# Allegro board RD_T31_SNIPE_M_V1.0_20190715A.brd
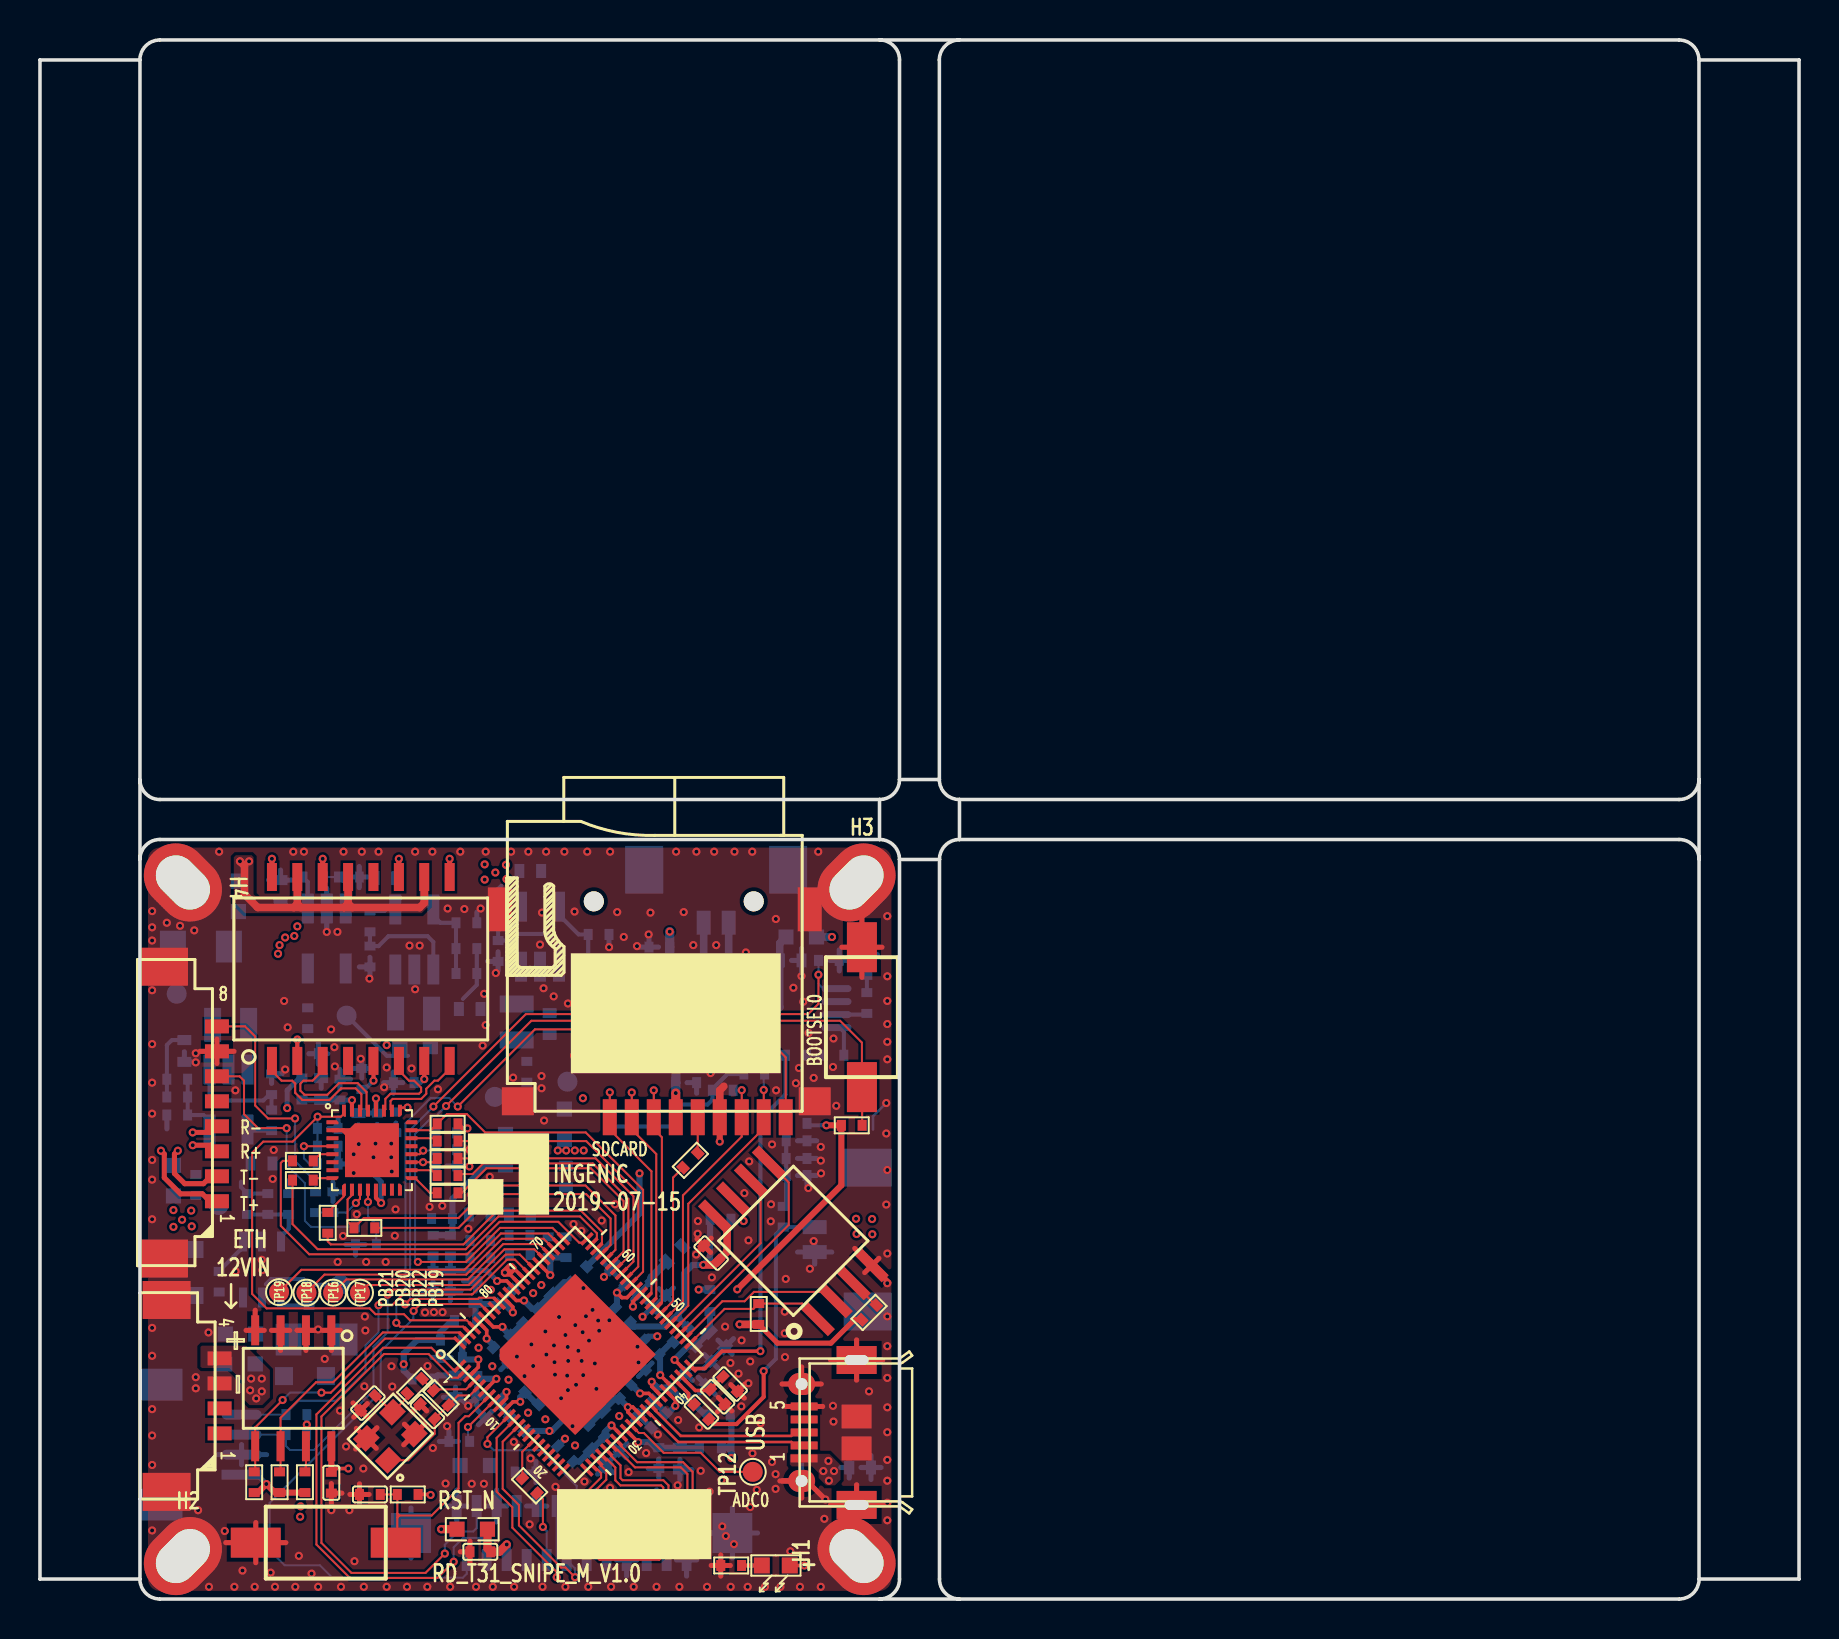
[diagram p0: board, top side]
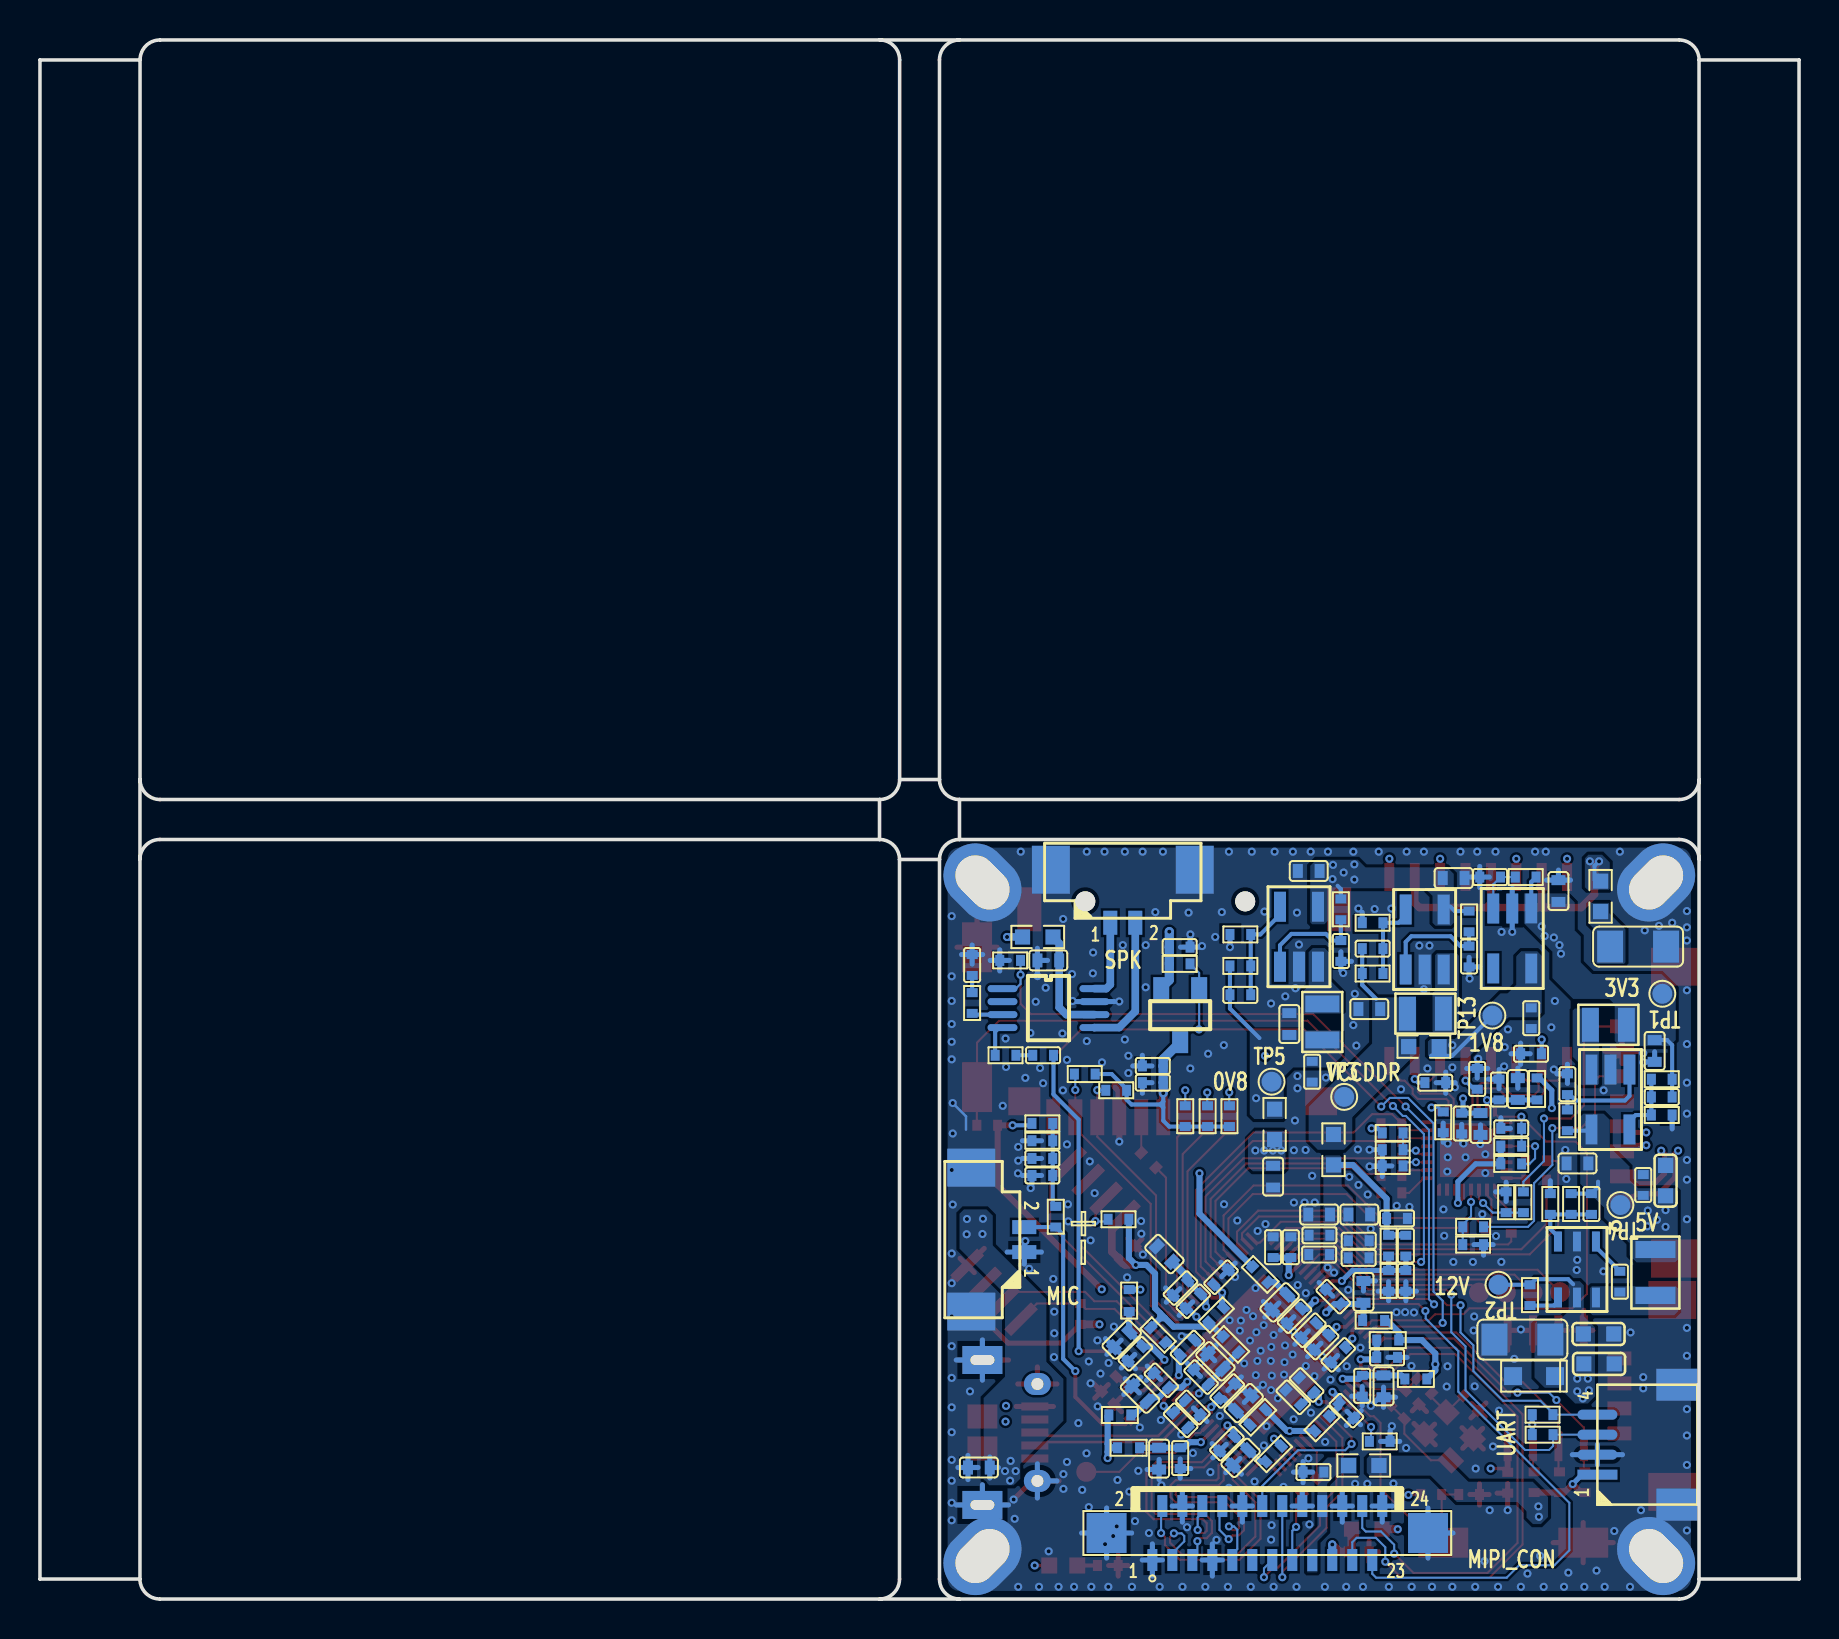
[diagram p1: board, bottom side, seen from below]

Outline 88 x 78 mm; copper layers: TOP, L2_GND, L3_PWR, BOTTOM. Coordinates in mm from the lower left corner of the outline.
Outline path: 5,1 0,1 0,77 5,77 ; 5,1 5,37 ; 5,1 arc(5.29,0.29) 6,0 42,0 ; 5,77 5,41 ; 5,77 arc(5.29,77.71) 6,78 42,78 ; 5,41 5,37 ; 5,41 arc(5.29,40.29) 6,40 42,40 ; 5,37 arc(5.29,37.71) 6,38 42,38 ; 42,40 42,38 ; 42,40 arc(42.71,40.29) 43,41 ; 42,38 arc(42.71,37.71) 43,37 ; 42,78 arc(42.71,77.71) 43,77 43,41 ; 42,78 45.99,78 ; 45.99,78 arc(45.29,77.71) 44.99,77 44.99,41 ; 45.99,78 81.99,78 arc(82.7,77.71) 82.99,77 ; 43,37 43,1 arc(42.71,0.29) 42,0 ; 43,37 45,37 ; 42,0 46,0 ; 46,0 arc(45.29,0.29) 45,1 45,37 ; 46,0 82,0 arc(82.71,0.29) 83,1 ; 43,41 44.99,41 ; 44.99,41 arc(45.29,40.29) 45.99,40 ; 45,37 arc(45.29,37.71) 46,38 ; 46,38 46,39.99 45.99,40 ; 46,38 82,38 arc(82.71,37.71) 83,37 ; 45.99,40 81.99,40 arc(82.7,40.29) 82.99,41 ; 82.99,77 82.99,41 ; 82.99,77 88,77 88,1 83,1 ; 83,37 83,40.99 82.99,41 ; 83,37 83,1

## Design rules (mm)
net group DP1: nets N15378792 N15378804
net group DP2: nets N15378878 N15378898
net group DP3: nets MIPI_DATAN1 MIPI_DATAP1
net group DP4: nets MIPI_DATAN0 MIPI_DATAP0
net group MIPI_CLK: nets MIPI_CLKN MIPI_CLKP
net group RX: nets RX+ RX-
net group TX: nets TX+ TX-
net group USB90: nets USB_DM0 USB_DP0
net group DEFAULT: nets BOOTSEL0 EXCLKI EXCLKO FX GMAC_CLKOUT GMAC_CRS_DV GMAC_MDC GMAC_MDIO GMAC_RST_N GMAC_RXD0 GMAC_RXD1 GMAC_TXD0 GMAC_TXD1 GMAC_TXEN IR IRCUTN IRCUTP LED LINK/ACT MII MSC0_CLK MSC0_CMD MSC0_D0 MSC0_D1 MSC0_D2 MSC0_D3 N3362923 N3362941 N15313394 N15316757 N15319926 N15320102 N15322230 N15322330 N15358486 N15358490 N15358494 N15359340 N15359934 N15360440 N15378796 N15379006 N15379034 N15379500 PPRST_N SD0_CD_N SENSOR_RESET SFC_CS_N SFC_SCLK SPEAK_EN SPEED
net group POW: nets AVDD_PHY CODEC_AVDD DDR_VREF DDRPLL_AVD18 HPOUT MICP N04375 N15313450 N15313454 N15316521 N15378850 N15378902 N15378968 N15382667 N15382675 N15382741 N15382761 N15382881 N15384349 USB_AVD18 USB_AVD33 VDDIO_D VDDMSC0
nets with their own width: min track width 0.127; nets GND

## Placement (name value [footprint] x y rotation side)
C1  22uF-1206  [C1206]  13.84 12.98 0 bottom
C2  10uF  [C0402_E]  11.08 21.79 0 bottom
C3  100nF  [C0402]  11.59 25.76 90 bottom
C4  22pF  [C0402]  6.87 25.12 0 bottom
C5  10uF  [C0402_E]  7.22 27.42 270 bottom
C6  22pF  [C0402]  21.33 32.54 180 bottom
C7  10uF  [C0402_E]  17.28 36.07 180 bottom
C8  100nF  [C0402]  16.51 32.15 270 bottom
C9  10uF  [C0402_E]  21.5 29.52 0 bottom
C10  10nF  [C0402]  8.96 15.88 270 bottom
C11  10uF-0603  [C0603]  10 11.76 180 bottom
C12  10uF-0603  [C0603]  10.03 13.26 180 bottom
C13  22pF  [C0402]  10.38 19.76 270 bottom
C14  10uF-0603  [C0603]  6.68 20.93 90 bottom
C15  100nF  [C0402]  7.79 20.72 90 bottom
C16  22pF  [C0402]  27.95 30.23 0 bottom
C17  10uF  [C0402_E]  24.53 36.43 0 bottom
C18  100nF  [C0402]  22.92 32.42 270 bottom
C19  10uF  [C0402_E]  25.5 28.77 90 bottom
C20  100nF  [C0402]  24.35 26.38 270 bottom
C21  100nF  [C0402]  19.67 17.68 90 bottom
C22  4.7uF  [C0402]  20.11 19.04 180 bottom
C23  100nF  [C0402]  19.67 15.92 90 bottom
C24  10uF  [C0402_E]  24.01 19.24 0 bottom
C25  100nF  [C0402]  22.03 17.93 180 bottom
C26  10nF  [C0402]  24.52 13.45 315 bottom
C27  10nF  [C0402]  30.95 15.56 315 bottom
C28  10nF  [C0402]  24.01 17.23 0 bottom
C29  10uF  [C0402_E]  22 19.24 180 bottom
C30  100nF  [C0402]  23.99 18.2 0 bottom
C31  10nF  [C0402]  30.93 8.94 225 bottom
C33  10nF  [C0402]  22.03 17.07 180 bottom
C34  10uF  [C0402_E]  26.31 21.13 270 bottom
C35  10uF  [C0402_E]  31.75 17.26 45 bottom
C36  100nF  [C0402]  30.32 9.59 225 bottom
C37  100nF  [C0402]  25.42 17.6 90 bottom
C38  100nF  [C0402]  23.88 12.83 315 bottom
C39  100nF  [C0402]  30.3 14.9 315 bottom
C40  100nF  [C0402]  24.63 10.71 45 bottom
C42  10nF  [C0402]  25.3 10.09 45 bottom
C43  10nF  [C0402]  26.31 17.6 90 bottom
C45  100nF  [C0402]  28.91 16.1 135 bottom
C48  100nF  [C0402]  22.64 9.42 225 bottom
C49  10uF  [C0402_E]  27.94 7.06 315 bottom
C50  100nF  [C0402]  28.62 7.77 315 bottom
C51  10uF  [C0402_E]  32.01 7.02 270 bottom
C52  100nF  [C0402]  30.96 7.05 270 bottom
C53  10uF  [C0402_E]  33.88 12.98 315 bottom
C54  100nF  [C0402]  33.2 12.27 315 bottom
C55  10uF  [C0402_E]  27.78 9.8 135 bottom
C56  100nF  [C0402]  28.61 10.41 135 bottom
C57  10uF  [C0402_E]  29.2 11.9 45 bottom
C58  100nF  [C0402]  29.91 11.11 45 bottom
C59  100nF  [C0402]  23.3 15.13 45 bottom
C60  100nF  [C0402]  25.24 14.15 315 bottom
C61  100nF  [C0402]  31.9 10.95 45 bottom
C64  100nF  [C0402]  34.53 10.76 135 top
C65  100nF  [C0402]  21.85 10.67 270 bottom
C67  12pF  [C0402]  19.38 9.38 315 top
C68  4.7uF  [C0402]  33.9 10.12 135 top
C69  12pF  [C0402]  16.4 9.8 45 top
C70  100nF  [C0402]  33.57 17.31 315 top
C72  100nF  [C0402]  14.58 5.82 90 top
C74  4.7uF  [C0402]  22.03 2.36 0 top
C77  4.7uF  [C0402]  30.98 32.62 180 bottom
C80  4.7uF  [C0402]  24.29 6.35 180 bottom
C81  100nF  [C0402]  32.33 25.83 0 bottom
C84  10uF  [C0402_E]  14.07 25.52 90 bottom
C85  100nF  [C0402]  15.01 25.49 90 bottom
C86  10uF  [C0402_E]  15.93 23.77 270 bottom
C87  100nF  [C0402]  16.87 23.79 270 bottom
C88  100nF  [C0402]  18.2 25.83 0 bottom
C89  100nF  [C0402]  16.1 26.02 270 bottom
C90  100nF  [C0402]  13.41 27.28 180 bottom
C91  1nF/2KV-1206  [C1206]  8.05 32.64 0 bottom
C92  100nF  [C0402]  14.4 23.55 0 bottom
C93  3.3nF  [C0402]  41.37 31.72 90 bottom
C94  3.3nF  [C0402]  37.82 27.2 180 bottom
C95  10uF  [C0402_E]  37.56 31.95 0 bottom
C97  100nF  [C0402]  33.09 9.36 315 top
C98  4.7uF  [C0402]  37.85 22.04 0 bottom
C99  100nF  [C0402]  37.85 21.19 0 bottom
C100  4.7uF  [C0402]  16.51 5.23 180 top
C101  4.7uF  [C0402]  32.33 26.67 0 bottom
C102  10uF  [C0402_E]  41.03 6.58 0 bottom
C103  10uF  [C0402_E]  21.79 15.37 90 bottom
C104  10uF  [C0402_E]  25.98 14.84 315 bottom
C105  10uF  [C0402_E]  32.97 10.28 45 bottom
C107  10uF  [C0402_E]  20.79 10.64 270 bottom
C111  10uF  [C0402_E]  12.04 35.42 90 bottom
C112  4.7uF  [C0402]  13.39 29.06 270 bottom
C113  100nF  [C0402]  15.45 36.12 0 bottom
C116  100nF  [C0402]  23.05 12.21 315 bottom
C118  100nF  [C0402]  30.59 12.58 135 bottom
C120  100nF  [C0402]  20.61 12.09 180 bottom
D1  BZT52C12S  [SOD323]  13.25 11.15 180 bottom
D2  LED Red  [D0603_LED]  36.81 1.68 180 top
FB11  1000ohm/250mA  [FB0402]  13.1 25.52 90 bottom
FB14  1000ohm/250mA  [FB0402]  26.29 7.26 135 bottom
FB15  1000ohm/250mA  [FB0402]  33.54 7.57 0 bottom
FB16  1000ohm/250mA  [FB0402]  27.07 9.09 135 bottom
FB17  1000ohm/250mA  [FB0402]  20.57 12.95 180 bottom
FB18  1000ohm/250mA  [FB0402]  19.17 11.01 180 bottom
FB19  1000ohm/250mA  [FB0402]  33.51 14.93 270 bottom
FB20  1000ohm/250mA  [FB0402]  33.98 9.21 180 bottom
FB21  1000ohm/250mA  [FB0402]  28.43 12.74 225 bottom
FB22  1000ohm/250mA  [FB0402]  26.95 16.24 45 bottom
FB23  1000ohm/250mA  [FB0402]  21.28 13.93 180 bottom
H1  MHOBL  [MHOLE_3D0X2D0]  40.85 2.15 90 top
H2  MHOBL  [MHOLE_3D0X2D0]  7.15 2.15 0 top
H3  MHOBL  [MHOLE_3D0X2D0]  40.85 35.85 0 top
H4  MHOBL  [MHOLE_3D0X2D0]  7.15 35.85 270 top
J1  CON4 1.25mm LT  [CON4-1D25-LT]  6.89 10.16 270 top
J3  MICROSD_TF  [TFCARD]  30.76 24.3 180 top
J4  CON8 1.25mm LT  [CON8-1D25-LT]  6.75 24.33 270 top
J5  CON2 1.25mm LT  [CON2-1D25-LT]  33.83 35.94 0 bottom
J7  CON2 1.25mm LT  [CON2-1D25-LT]  40.86 17.98 270 bottom
J9  MICRO USB  [MICROUSB_B_NJ5P]  38.23 8.33 270 top
J18  CON24 0.5mm LT  [FPC-CON24-0D5-LT]  26.6 3.3 180 bottom
J38  CON4 1.0mm WT  [CON4-1D0-WT]  7.59 7.72 90 bottom
L1  2.2uH/1.3A-2016  [L2016]  9.54 28.73 0 bottom
L2  2.2uH/1.3A-2016  [L2016]  18.69 29.29 180 bottom
L3  4.7uH/1.4A-2520  [L2520]  7.18 16.33 90 bottom
L4  2.2uH/1.3A-2016  [L2016]  23.85 28.87 90 bottom
NOREF  -  []  44.66 -10.88 0 top
NOREF#2  -  []  -41.62 136.12 0 top
NOREF#3  -  []  41.27 158.18 0 top
NOREF#4  -  []  31.26 6.54 0 top
NOREF#5  -  []  -189.11 -122.58 0 top
NOREF#6  -  []  5 1 0 top
NOREF#7  -  []  5.32 37.73 0 top
NOREF#8  -  []  6 0 90 top
Q1  WPM3401  [SOT23]  30.96 29.21 0 bottom
R1  100K  [R0402]  11.59 23.95 90 bottom
R2  150K/1%  [R0402]  6.87 26.01 180 bottom
R3  33.2K/1%  [R0402]  6.87 24.22 0 bottom
R4  100K  [R0402]  16.51 33.9 270 bottom
R5  200K/1%  [R0402]  21.33 31.29 180 bottom
R6  100K/1%  [R0402]  21.33 33.83 180 bottom
R7  100K  [R0402]  13.46 15.2 270 bottom
R8  200K/1%  [R0402]  11.4 19.76 270 bottom
R9  27K/1%  [R0402]  12.44 19.76 270 bottom
R10  100K  [R0402]  22.92 34.5 270 bottom
R11  40.2K/1%  [R0402]  27.95 31.68 0 bottom
R12  120K/1%  [R0402]  27.95 33.25 180 bottom
R13  1K  [R0402]  34.58 1.68 180 top
R17  100K/1%  [R0402]  20.53 17.68 90 bottom
R19  100K/1%  [R0402]  20.53 15.92 90 bottom
R20  1M  [R0402]  20.06 10.07 315 top
R21  33R  [R0402]  18.75 10.66 45 top
R22  33R  [R0402]  16.23 18.57 180 top
R23  33R  [R0402]  14.4 18.82 90 top
R24  33R  [R0402]  13.15 20.96 0 top
R25  33R  [R0402]  13.15 21.92 0 top
R26  33R  [R0402]  20.39 22.91 180 top
R27  33R  [R0402]  24.49 5.66 135 top
R29  33R  [R0402]  32.54 21.95 45 top
R30  10K  [R0402]  13.25 5.84 90 top
R31  10K  [R0402]  10.71 5.84 270 top
R32  10K  [R0402]  11.98 5.84 270 top
R33  0R  [R0402]  29.16 14.21 135 bottom
R34  0R-0603  [R0603]  23.29 22.48 90 bottom
R35  33R  [R0402]  20.98 7.89 0 bottom
R37  100K  [R0402]  34.16 25.45 0 bottom
R38  100K  [R0402]  30.7 24.16 90 bottom
R39  100K  [R0402]  35.73 26.27 0 bottom
R40  100K  [R0402]  28.49 24.16 90 bottom
R41  100K  [R0402]  29.59 24.16 90 bottom
R42  100K  [R0402]  30.98 31.78 180 bottom
R44  10K  [R0402]  14.4 21.77 0 bottom
R45  10K  [R0402]  20.33 23.32 0 bottom
R46  10K  [R0402]  20.33 22.48 0 bottom
R47  10K  [R0402]  20.33 21.67 0 bottom
R48  10K  [R0402]  14.65 19.85 90 bottom
R49  10K  [R0402]  20.39 23.77 0 top
R50  33R  [R0402]  20.39 21.18 180 top
R51  10K  [R0402]  16.3 17.73 180 bottom
R52  33R  [R0402]  20.39 20.32 180 top
R53  33R  [R0402]  20.39 22.05 180 top
R54  75R/1%-0603  [R0603]  9.93 35.16 90 bottom
R55  10K  [R0402]  14.4 22.66 0 bottom
R56  300R  [R0402]  16.3 18.62 0 bottom
R57  300R  [R0402]  13.79 19.85 270 bottom
R58  6.19K/1%  [R0402]  17.8 23.85 270 bottom
R59  10K  [R0402]  39.47 31.95 0 bottom
R60  0R  [R0402]  23.86 8.78 135 bottom
R61  68K/1%  [R0402]  41.37 29.82 90 bottom
R62  68K/1%  [R0402]  39.7 27.2 180 bottom
R63  0R-0603  [R0603]  26.23 23.75 270 bottom
R64  0R  [R0402]  32.06 13.21 45 bottom
R65  2.2K  [R0402]  37.18 19.13 270 bottom
R66  10K  [R0402]  41.47 14.34 45 top
R67  10K  [R0402]  35.96 14.26 90 top
R68  10K  [R0402]  34.05 19 180 bottom
R69  82K/1%  [R0402]  37.85 23.8 0 bottom
R70  100K/1%  [R0402]  37.85 22.93 180 bottom
R71  100K  [R0402]  40.61 23.7 180 top
R72  10K  [R0402]  12.82 8.22 180 bottom
R73  10K  [R0402]  12.83 9.22 180 bottom
R74  0R-0603  [R0603]  38.08 33.12 0 bottom
R77  100K  [R0402]  18.4 5.23 180 top
R85  100K  [R0402]  13.67 36.12 0 bottom
R86  0R-0603  [R0603]  18.77 27.64 0 bottom
R87  0R-0603  [R0603]  21.78 6.68 0 bottom
R88  0R-0603  [R0603]  21.62 3.49 0 top
SW1  KEY2_SMD  [SW2_SMD]  41.12 29.11 270 top
SW2  KEY2_SMD  [SW2_SMD]  14.3 2.82 0 top
TP1  TP  [TEST_SMD]  6.84 30.28 0 bottom
TP2  TP  [TEST_SMD]  15.03 15.72 0 bottom
TP3  TP  [TEST_SMD]  22.75 25.12 180 bottom
TP4  TP  [TEST_SMD]  8.94 19.71 0 bottom
TP5  TP  [TEST_SMD]  26.39 25.88 180 bottom
TP12  TP  [TEST_SMD]  35.66 6.36 90 top
TP13  TP  [TEST_SMD]  15.34 29.19 90 bottom
TP16  TP  [TEST_SMD]  14.66 15.33 90 top
TP17  TP  [TEST_SMD]  16.01 15.33 90 top
TP18  TP  [TEST_SMD]  13.33 15.33 90 top
TP19  TP  [TEST_SMD]  11.96 15.35 90 top
U1  LN5058  [SOT23-5]  9.43 24.99 0 bottom
U2  LN5058  [SOT23-5]  18.73 33 180 bottom
U3  ETA8120  [SOT23-6]  11.11 16.49 270 bottom
U4  LN5058  [SOT23-5]  25.02 33.14 180 bottom
U6  GD25Q127CSIG  [WSOP8_1D27]  37.69 17.92 135 top
U7  AT24C02  [SOP8_1D27]  12.67 10.54 270 top
U8  IP101GR  [QFN32_0D4_IP101GR]  16.61 22.46 0 top
U9  FC1680C  [QFP16_1D27]  16.05 31.52 90 top
U10  CS8302M  [MSOP8_0D65]  37.55 29.56 270 bottom
U11  S-1339D18  [SOT23-5]  14.35 33.05 0 bottom
U12  T31 QFN88  [QFN88_0D35_T31]  26.77 12.24 45 top
Y1  24M 2016  [CRY_2D5X2D0]  17.53 8.14 45 top

## Library data of the parts
C1-C31 C33-C40 C42 C43 C45 C48-C61 C64 C65 C67-C70 C72 C74 C77 C80 C81 C84-C95 C97-C105 C107 C111-C113 C116 C118 C120 = CAP
D1 = DIODE_WY
D2 = LED_1
FB11 FB14-FB23 = BEAD
H1-H4 = MHOLE1
J1 = CON_4x1
J3 = MMC_SD
J4 = CON_8x1
J5 J7 = CON_2X1
J9 = MICROUSB_0
J18 = FPCCON_12x2
J38 = CON_4X1
L1-L4 = INDUCTOR
Q1 = P_MOS
R1-R13 R17 R19-R27 R29-R35 R37-R42 R44-R74 R77 R85-R88 = RES
SW1 SW2 = PUSHBUTTON
TP1-TP5 TP12 TP13 TP16-TP19 = TP
U1 U2 U4 = SY8088
U3 = SY8120
U6 = SPI_NOR
U7 = 24C02
U8 = IP101GR
U9 = FC1680C
U10 = CS8302
U11 = SGM2019
U12 = T31_QFN88
Y1 = XTAL_P4

## Footprints (pads in the part's own frame, mm; a bottom-side part is the same pattern mirrored in y, then rotated)
C0402
  rect 0.45x0.55 smd: 1(-0.52,0) 2(0.52,0)
C0402_E
  rect 0.5x0.7 smd: 1(-0.545,0) 2(0.545,0)
C0603
  rect 0.76x0.76 smd: 1(-0.762,0) 2(0.762,0)
C1206
  rect 1.3x1.6 smd: 1(-1.4,0) 2(1.4,0)
CON2-1D25-LT
  rect 0.7x1.2 smd: 1(0.625,2.1) 2(-0.625,2.1)
  rect 1.9x2.4 smd: 3(-3.6,-0.55) 4(3.6,-0.55)
CON4-1D0-WT
  rect 0.5x2 smd: 1(-1.5,2.5)
  oval 0.5x2 smd: 2(-0.5,2.5) 3(0.5,2.5) 4(1.5,2.5)
  rect 1.6x2.1 smd: 5(3,-1.5) 6(-3,-1.5)
CON4-1D25-LT
  rect 0.7x1.2 smd: 1(1.875,2.1) 2(0.625,2.1) 3(-0.625,2.1) 4(-1.875,2.1)
  rect 1.9x2.4 smd: 5(-4.8,-0.55) 6(4.8,-0.55)
CON8-1D25-LT
  rect 0.7x1.2 smd: 1(4.435,2.1) 2(3.185,2.1) 3(1.935,2.1) 4(0.685,2.1) 5(-0.565,2.1) 6(-1.815,2.1) 7(-3.065,2.1) 8(-4.315,2.1)
  rect 1.9x2.4 smd: 9(-7.3,-0.55) 10(7.3,-0.55)
CRY_2D5X2D0
  rect 1x0.9 smd: 1(-0.925,-0.775) 2(0.925,-0.775) 3(0.925,0.775) 4(-0.925,0.775)
D0603_LED
  rect 0.8x0.8 smd: 1(-0.7,0) 2(0.7,0)
FB0402
  rect 0.45x0.55 smd: 1(-0.55,0) 2(0.55,0)
FPC-CON24-0D5-LT
  rect 0.5x1.1 smd: 1(-5.75,-1.35) 2(-5.25,1.35) 3(-4.75,-1.35) 4(-4.25,1.35) 5(-3.75,-1.35) 6(-3.25,1.35) 7(-2.75,-1.35) 8(-2.25,1.35) 9(-1.75,-1.35) 10(-1.25,1.35) 11(-0.75,-1.35) 12(-0.25,1.35) 13(0.25,-1.35) 14(0.75,1.35) 15(1.25,-1.35) 16(1.75,1.35) 17(2.25,-1.35) 18(2.75,1.35) 19(3.25,-1.35) 20(3.75,1.35) 21(4.25,-1.35) 22(4.75,1.35) 23(5.25,-1.35) 24(5.75,1.35)
  rect 2x2 smd: 25(-8.04,0) 26(8.04,0)
L2016
  rect 0.85x1.7 smd: 1(0.9,0) 2(-0.9,0)
L2520
  rect 0.85x2 smd: 1(-1.15,0) 2(1.15,0)
MHOLE_3D0X2D0
  oval 4.2x3.2 hole 3x2 rot 45: 1(0,0)
MICROUSB_B_NJ5P
  rect 0.4x1.35 smd: 1(1.3,0) 2(0.65,0) 3(0,0) 4(-0.65,0) 5(-1.3,0)
  rect 1.4x2 hole 0.5x1.2: 6(3.625,2.625) 7(-3.625,2.625)
  oval 1.1x1.35 hole 0.6: 8(-2.425,-0.125) 9(2.425,-0.125)
  rect 1.2x1.5 smd: 10(-0.8,2.625) 11(0.8,2.625)
MSOP8_0D65
  oval 0.35x1.5 smd: 1(-0.975,-2.3) 2(-0.325,-2.3) 3(0.325,-2.3) 4(0.975,-2.3) 5(0.975,2.3) 6(0.325,2.3) 7(-0.325,2.3) 8(-0.975,2.3)
QFN32_0D4_IP101GR
  custom 0.599x0.198 smd: 1(-1.975,1.4) 8(-1.975,-1.4) 17(1.975,-1.4) 24(1.975,1.4)
  rect 0.6x0.2 smd: 2(-1.975,1) 3(-1.975,0.6) 4(-1.975,0.2) 5(-1.975,-0.2) 6(-1.975,-0.6) 7(-1.975,-1) 18(1.975,-1) 19(1.975,-0.6) 20(1.975,-0.2) 21(1.975,0.2) 22(1.975,0.6) 23(1.975,1)
  custom 0.198x0.599 smd: 9(-1.4,-1.975) 16(1.4,-1.975) 25(1.4,1.975) 32(-1.4,1.975)
  rect 0.2x0.6 smd: 10(-1,-1.975) 11(-0.6,-1.975) 12(-0.2,-1.975) 13(0.2,-1.975) 14(0.6,-1.975) 15(1,-1.975) 26(1,1.975) 27(0.6,1.975) 28(0.2,1.975) 29(-0.2,1.975) 30(-0.6,1.975) 31(-1,1.975)
  custom 2.697x2.697 smd: 33(0,0)
QFN88_0D35_T31
  rect 0.8x0.18 smd: 1(-4.5,3.675) 2(-4.5,3.325) 3(-4.5,2.975) 4(-4.5,2.625) 5(-4.5,2.275) 6(-4.5,1.925) 7(-4.5,1.575) 8(-4.5,1.225) 9(-4.5,0.875) 10(-4.5,0.525) 11(-4.5,0.175) 12(-4.5,-0.175) 13(-4.5,-0.525) 14(-4.5,-0.875) 15(-4.5,-1.225) 16(-4.5,-1.575) 17(-4.5,-1.925) 18(-4.5,-2.275) 19(-4.5,-2.625) 20(-4.5,-2.975) 21(-4.5,-3.325) 22(-4.5,-3.675) 45(4.5,-3.675) 46(4.5,-3.325) 47(4.5,-2.975) 48(4.5,-2.625) 49(4.5,-2.275) 50(4.5,-1.925) 51(4.5,-1.575) 52(4.5,-1.225) 53(4.5,-0.875) 54(4.5,-0.525) 55(4.5,-0.175) 56(4.5,0.175) 57(4.5,0.525) 58(4.5,0.875) 59(4.5,1.225) 60(4.5,1.575) 61(4.5,1.925) 62(4.5,2.275) 63(4.5,2.625) 64(4.5,2.975) 65(4.5,3.325) 66(4.5,3.675)
  rect 0.18x0.8 smd: 23(-3.675,-4.5) 24(-3.325,-4.5) 25(-2.975,-4.5) 26(-2.625,-4.5) 27(-2.275,-4.5) 28(-1.925,-4.5) 29(-1.575,-4.5) 30(-1.225,-4.5) 31(-0.875,-4.5) 32(-0.525,-4.5) 33(-0.175,-4.5) 34(0.175,-4.5) 35(0.525,-4.5) 36(0.875,-4.5) 37(1.225,-4.5) 38(1.575,-4.5) 39(1.925,-4.5) 40(2.275,-4.5) 41(2.625,-4.5) 42(2.975,-4.5) 43(3.325,-4.5) 44(3.675,-4.5) 67(3.675,4.5) 68(3.325,4.5) 69(2.975,4.5) 70(2.625,4.5) 71(2.275,4.5) 72(1.925,4.5) 73(1.575,4.5) 74(1.225,4.5) 75(0.875,4.5) 76(0.525,4.5) 77(0.175,4.5) 78(-0.175,4.5) 79(-0.525,4.5) 80(-0.875,4.5) 81(-1.225,4.5) 82(-1.575,4.5) 83(-1.925,4.5) 84(-2.275,4.5) 85(-2.625,4.5) 86(-2.975,4.5) 87(-3.325,4.5) 88(-3.675,4.5)
  custom 5.7x5.7 smd: 89(0,0)
QFP16_1D27
  rect 1.4x0.5 smd: 1(-4.6,4.445) 2(-4.6,3.175) 3(-4.6,1.905) 4(-4.6,0.635) 5(-4.6,-0.635) 6(-4.6,-1.905) 7(-4.6,-3.175) 8(-4.6,-4.445) 9(4.6,-4.445) 10(4.6,-3.175) 11(4.6,-1.905) 12(4.6,-0.635) 13(4.6,0.635) 14(4.6,1.905) 15(4.6,3.175) 16(4.6,4.445)
R0402
  rect 0.45x0.55 smd: 1(-0.52,0) 2(0.52,0)
R0603
  rect 0.76x0.76 smd: 1(-0.762,0) 2(0.762,0)
SOD323
  rect 0.9x0.9 smd: 1(-1.05,0) 2(1.05,0)
SOP8_1D27
  rect 1.5x0.4 smd: 1(-2.9,1.905) 2(-2.9,0.635) 3(-2.9,-0.635) 4(-2.9,-1.905) 5(2.9,-1.905) 6(2.9,-0.635) 7(2.9,0.635) 8(2.9,1.905)
SOT23
  rect 0.8x1.1 smd: 1(-0.95,-1.35) 2(0.95,-1.35) 3(0,1.35)
SOT23-5
  rect 0.6x1.5 smd: 1(-0.95,-1.5) 2(0,-1.5) 3(0.95,-1.5) 4(0.95,1.5) 5(-0.95,1.5)
SOT23-6
  rect 1x0.4 smd: 1(-1.4,0.95) 2(-1.4,0) 3(-1.4,-0.95) 4(1.4,-0.95) 5(1.4,0) 6(1.4,0.95)
SW2_SMD
  rect 2.5x1.5 smd: 1(-3.5,0) 2(3.5,0)
TEST_SMD
  round 1 smd: 1(0,0)
TFCARD
  round 1 hole 1 unplated: (-4.95,-10.6) (3.05,-10.6)
  rect 0.7x1.8 smd: 1(2.25,0.2) 2(1.15,0.2) 3(0.05,0.2) 4(-1.05,0.2) 5(-2.15,0.2) 6(-3.25,0.2) 7(-4.35,0.2) 8(-5.45,0.2) 9(-6.55,0.2)
  rect 1.6x1.4 smd: 10(-8,-0.6) 13(6.85,-0.6)
  rect 1.2x2.2 smd: 11(-7.75,-10.2) 12(7.75,-10.2)
WSOP8_1D27
  rect 1.9x0.5 smd: 1(-3.645,1.905) 2(-3.645,0.635) 3(-3.645,-0.635) 4(-3.645,-1.905) 5(3.645,-1.905) 6(3.645,-0.635) 7(3.645,0.635) 8(3.645,1.905)

## Nets
AVDD_PHY: C84.1 C85.1 FB11.1 U8.31(AVDD33)
GND: C1.2 C2.2 C3.2 C5.2 C7.2 C8.2 C9.2 C11.2 C12.2 C14.2 C15.2 C17.2 C18.2 C19.2 C20.2 C22.2 C23.1 C24.2 C25.2 C26.2 C27.2 C28.2 C29.2 C30.2 C31.2 C33.2 C34.2 C35.2 C36.2 C37.2 C38.2 C39.2 C40.2 C42.2 C43.2 C45.2 C48.2 C49.2 C50.2 C51.2 C52.2 C53.2 C54.2 C55.2 C56.2 C57.2 C58.2 C59.2 C60.2 C61.2 C64.1 C65.2 C67.1 C68.1 C69.1 C70.1 C72.1 C74.1 C77.2 C80.1 C81.2 C84.2 C85.2 C86.2 C87.2 C88.1 C89.1 C90.1 C91.1 C92.2 C93.2 C95.2 C98.2 C99.2 C100.2 C101.2 C102.2 C103.2 C104.2 C105.2 C107.2 C111.2 C112.2 C113.2 C116.2 C118.2 C120.2 D1.1 H1.1(A) H2.1(A) H3.1(A) H4.1(A) J1.3 J1.5(S1) J1.6(S2) J3.6(VSS2) J3.10(GND_2) J3.11(GND_1) J3.12(PAD1) J3.13(PAD2) J4.7 J4.9(S1) J4.10(S2) J5.3(S1) J5.4(S2) J7.1 J7.3(S1) J7.4(S2) J9.5(GND1) J9.6(GND2) J9.7(GND3) J9.8(GND4) J9.9(GND5) J9.10(GND6) J9.11(GND7) J18.1 J18.4 J18.7 J18.10 J18.16 J18.20 J18.24 J18.25(S1) J18.26(S2) J38.2 J38.5(S1) J38.6(S2) R3.1 R6.1 R9.1 R12.1 R13.2 R19.1 R35.1 R46.2 R47.2 R48.2 R51.2 R58.2 R59.2 R70.1 SW1.1 SW2.1 U1.2(GND) U2.2(GND) U3.2(GND) U4.2(GND) U6.4(GND) U7.1(A0) U7.2(A1) U7.3(A2) U7.4(GND) U8.2(X1) U8.33(GND_EP) U10.7(GND) U11.2(GND) U12.89(E-PAD_VSS) Y1.2 Y1.4
VCC_0V8: C16.2 C19.1 C20.1 FB14.2 FB22.2 L4.2 R11.2 R63.1 TP5.1
VCC_1V8: C112.1 FB15.2 FB16.2 FB17.2 FB18.2 FB19.1 FB20.1 FB23.2 R60.1 R77.1 R86.1 TP13.1 U11.5(VOUT)
VCC_3V3: C4.1 C5.1 C70.2 C72.2 C77.1 C111.1 D2.1(ANODE) FB11.2 FB21.1 J38.1 L1.2 Q1.2(SOURCE) R2.2 R30.1 R31.2 R32.2 R33.1 R42.1 R44.2 R45.2 R49.2 R55.2 R64.2 R66.1 R67.1 R68.2 R69.2 R71.2 R72.1 R73.1 R85.1 R88.1 TP1.1 U6.8(VCC) U7.8(VCC) U8.13(VDD_IO) U11.1(VIN)
VCC_5V: C2.1 C7.1 C13.1 C14.1 C15.1 C17.1 C102.1 J9.1(VBUS) L3.2 R1.1 R4.1 R8.1 R10.1 R74.2 R87.1 TP4.1 U1.4(IN) U2.4(IN) U4.4(IN)
VCC_12V: C1.1 C11.1 C12.1 D1.2 J1.4 R7.1 TP2.1 U3.5(VIN)
VCC_DDR: C6.1 C9.1 L2.2 R5.1 R34.2 R86.2 TP3.1
VDD: C26.1 C27.1 C31.1 C34.1 C35.1 C36.1 C37.1 C38.1 C39.1 C40.1 C42.1 C43.1 R63.2 U12.10(VDD_1) U12.39(VDD_2) U12.55(VDD_3) U12.72(VDD_4) U12.83(VDD_5)
VDDIO1: C45.1 C116.1 R33.2 U12.56(VDDIO1_1) U12.84(VDDIO1_2)
VDDIO2: C118.1 R64.1 U12.40(VDDIO2)
VDDIO_D: C48.1 R60.2 U12.9(VDDIO0)
VDDIO_OSC: C120.1 FB17.1 U12.3(VDDIO_OSC)
VDDMSC0: C81.1 C101.1 J3.4(VDD) Q1.3(DRAIN) R37.1 R38.1 R39.1 R40.1 R41.1
ADC0: TP12.1 U12.32(ADC_AUX0)
ADC_AVDD: C55.1 C56.1 FB16.1 U12.33(ADC_VREF) U12.34(ADC_AVDD)
BOOTSEL0: R71.1 SW1.2 U12.67(BOOT_SEL0_PC00)
CODEC_AVDD: C53.1 C54.1 FB19.2 U12.43(CODEC_AVDD)
DDR_VREF: C21.1 C23.2 R17.1 R19.2 U12.77(VREF)
DDRPLL_AVD08: C60.1 C104.1 FB22.1 U12.78(DDR_PLLVCCD)
DDRPLL_AVD18: C59.1 C103.1 FB23.1 U12.79(DDR_PLLVCCA)
DDRVDD: C21.2 C22.1 C24.1 C25.1 C28.1 C29.1 C30.1 C33.1 R17.2 R34.1 U12.75(DDRVDD) U12.76(VDDMEM)
EXCLKI: C67.2 R20.2 U12.5(EXCLK_XI) Y1.1
EXCLKO: R20.1 R21.2 U12.4(EXCLK_XO)
FX: R47.1 R53.2 U8.19(RXDV/CRS_DV/FX_HEN)
GMAC_CLKOUT: R22.2 U8.10(TXCLK/50M_CLKI) U12.62(GMAC_TXCLK_SLCD_D0_PB06)
GMAC_CRS_DV: R53.1 U12.59(GMAC_RXDV_MSC1_CMD_I2S_SDTI_SLC)
GMAC_MDC: R26.2 U8.22(MDC)
GMAC_MDIO: R49.1 U8.23(MDIO) U12.57(GMAC_MDIO_MSC1_D1_SLCD_D5_PB11)
GMAC_RST_N: C92.1 R55.1 U8.32(RESET_N) U12.85(DMIC_CLK_PB28)
GMAC_RXD0: R50.1 U12.60(GMAC_RXD0_I2S_DAC_LRCK_SLCD_WR_)
GMAC_RXD1: R52.1 U12.61(GMAC_RXD1_SLCD_TE_PB16)
GMAC_TXD0: R23.2 U8.9(TXD0)
GMAC_TXD1: R24.2 U8.8(TXD1)
GMAC_TXEN: R25.2 U8.5(TXEN)
HPOUT: C94.2 U12.44(HPOUT)
I2C0_SCK: J18.14 U12.12(SD7_SMB0_SCK_PA13)
I2C0_SDA: J18.13 U12.13(SD6_SMB0_SDA_PA12)
I2C1_SCK: R32.1 U7.6(SCL) U12.87(SMB1_SCK_PB26)
I2C1_SDA: R31.1 U7.5(SDA) U12.88(SMB1_SDA_PB25)
IR: J18.23 U12.82(DMIC_DAT0_PB29)
IRCUTN: J18.22 U12.2(PWM1_SSI1_DR_PB18)
IRCUTP: J18.21 U12.1(PWM0_SSI1_DT_PB17)
LED: R45.1 R46.1 U8.20(CRS/LEDMOD)
LINK/ACT: R48.1 R57.2 U8.11(LED0/PHY_AD0)
MCLK: R27.2 U12.16(SA1_DVP_MCLK_PA15)
MICP: C97.1 U12.41(MICLP)
MII: R44.1 U8.4(COL/RMII)
MIPI_3V3: C74.2 J18.19 R88.2
MIPI_5V: C80.2 J18.17 J18.18 R87.2
MIPI_AVD08: C49.1 C50.1 FB14.1 U12.30(MIPI_AVD08)
MIPI_AVD18: C51.1 C52.1 FB15.1 U12.31(MIPI_AVD18)
MIPI_CLKN: J18.8 U12.26(DVP_D3_CLKN)
MIPI_CLKP: J18.9 U12.27(DVP_D2_CLKP)
MIPI_DATAN0: J18.2 U12.24(DVP_D5_DATAN0)
MIPI_DATAN1: J18.5 U12.28(DVP_D1_DATAN1)
MIPI_DATAP0: J18.3 U12.25(DVP_D4_DATAP0)
MIPI_DATAP1: J18.6 U12.29(DVP_D0_DATAP1)
MIPI_MCLK: J18.15 R27.1
MSC0_CLK: J3.5(CLK) R29.2
MSC0_CMD: J3.3(CMD) R38.2 U12.52(MSC0_CMD_SSI_SLV_CE0_PB05)
MSC0_D0: J3.7(DAT0) R37.2 U12.50(MSC0_D0_SSI_SLV_DT_PB00)
MSC0_D1: J3.8(DAT1) R39.2 U12.49(MSC0_D1_SSI_SLV_DR_PB01)
MSC0_D2: J3.1(DAT2) R40.2 U12.54(MSC0_D2_PB02)
MSC0_D3: J3.2(DAT3) R41.2 U12.53(MSC0_D3_PB03)
PB19: TP17.1 U12.71(UART0_RXD_PB19)
PB20: TP18.1 U12.69(UART0_CTS_PB20)
PB21: TP19.1 U12.68(UART0_RTS__PB21)
PB22: TP16.1 U12.70(UART0_TXD_PB22)
PLL_VDDHV: C65.1 C107.1 FB18.1 U12.6(PLL_VDDHV)
PPRST_N: C100.1 R77.2 SW2.2 U12.7(PPRST_)
RX+: J4.3 U9.11(RX+/TX+)
RX-: J4.4 U9.9(RX-/TX-)
SD0_CD_N: J3.9(CD) Q1.1(GATE) R42.2 U12.86(DRV_VBUS_PB27)
SENSOR_RESET: J18.12 U12.11(SA2_PA18)
SFC_CS_N: R67.2 U6.1(C\S\) U12.45(SFC_CE0_PA28)
SFC_DR: U6.2(SO/SIO1) U12.46(SFC_DR_PA24)
SFC_DT: U6.5(SI/SIO0) U12.47(SFC_DT_PA23)
SFC_SCLK: U6.6(SCLK) U12.48(SFC_CLK_PA27)
SPEAK_EN: R59.1 U10.1(/SD) U12.80(GPIO_PB31)
SPEED: R51.1 R56.2 U8.12(LED3/PHY_AD3)
TX+: J4.1 U9.16(TX+/RX+)
TX-: J4.2 U9.14(TX-/RX-)
UART1_RXD: J38.3 R72.2 U12.73(UART1_RXD_PB24)
UART1_TXD: J38.4 R73.2 U12.74(UART1_TXD_PB23)
USB_AVD18: C61.1 C105.1 FB20.2 U12.38(USB_AVD18)
USB_AVD33: C57.1 C58.1 FB21.2 U12.37(USB_AVD33)
USB_DM0: J9.2(D-) U12.35(USB0PN)
USB_DP0: J9.3(D+) U12.36(USB0PP)
N04375: D2.2(CATHODE) R13.1
N3362923: J4.6 R56.1
N3362941: J4.8 R57.1
N15313394: C13.2 R8.2 R9.2 U3.3(FB)
N15313450: R7.2 U3.4(EN)
N15313454: C10.1 U3.1(BS)
N15313470: C10.2 L3.1 U3.6(LX)
N15316521: C3.1 R1.2 U1.1(EN)
N15316757: C4.2 R2.1 R3.2 U1.5(FB)
N15316793: L1.1 U1.3(LX)
N15319926: C8.1 R4.2 U2.1(EN)
N15320102: C6.2 R5.2 R6.2 U2.5(FB)
N15320122: L2.1 U2.3(LX)
N15322230: C18.1 R10.2 U4.1(EN)
N15322330: C16.1 R11.1 R12.2 U4.5(FB)
N15322334: L4.1 U4.3(LX)
N15358486: R24.1 U12.65(GMAC_TXD1_MSC1_D3_I2S_DAC_MCLK_)
N15358490: R25.1 U12.66(GMAC_TXEN_MSC1_CLK_I2S_ADC_MCLK)
N15358494: R26.1 U12.58(GMAC_MDCK_MSC1_D0_I2S_SDTO_SLCD)
N15359340: R29.1 U12.51(MSC0_CLK_SSI_SLV_CLK_PB04)
N15359934: C69.2 R21.1 Y1.3
N15360440: R30.2 U7.7(WP)
N15378792: U8.30(MDI_TP) U9.1(TD+/RD+)
N15378796: C86.1 C87.1 U8.28(REGOUT)
N15378804: U8.29(MDI_TN) U9.3(TD-/RD-)
N15378850: C90.2 U9.2(CT1)
N15378878: U8.27(MDI_RP) U9.6(RD+/TD+)
N15378882: R54.2 U9.10(CT3) U9.13(MCT) U9.15(CT4)
N15378898: U8.26(MDI_RN) U9.8(RD-/TD-)
N15378902: C89.2 U9.5(CT)
N15378968: C88.2 U9.7(CT2)
N15379006: R52.2 U8.17(RXD1)
N15379034: R50.2 U8.18(RXD0)
N15379500: R58.1 U8.25(ISET)
N15379944: C91.2 R54.1
N15382667: J5.2 U10.5(VO+)
N15382675: J5.1 U10.8(VO-)
N15382715: C95.1 R74.1 U10.6(VDD)
N15382741: R62.1 U10.4(-IN)
N15382761: C94.1 R62.2
N15382769: C93.1 R61.2
N15382881: R61.1 U10.3(+IN)
N15384349: C97.2 J7.2 R65.2
N15384377: C98.1 C99.1 R65.1 R69.1 R70.2
N15480555: C113.1 R85.2 U11.3(EN)
N16223536: C64.2 C68.2 U12.42(VCM)
N16529866: R66.2 U6.3(W\P\/SIO2)
N16529875: R68.1 U6.7(R\E\S\E\T\/SIO3)
N16530420: R22.1 U12.63(GMAC_PHY_CLK_SLCD_D1_PB07)
N16530465: R23.1 U12.64(GMAC_TXD0_MSC1_D2_I2S_ADC_LRCK_)
N16534552: R35.2 U12.8(EFUSE_AVD)

Pads without a net: J1 1 2; J4 5; J9 4; J18 11; U8 1 3 6 7 14 15 16 21 24; U9 4 12; U10 2; U11 4; U12 14 15 17 18 19 20 21 22 23 81

## Via types
v1: diameter 0.406, hole 0.203, TOP to BOTTOM, 488 vias

## Routing (per net, layer and track width the routed paths; a pad name or vN(x,y) marks a point on that pad's centre or on a via; arc(x,y) is an arc through that point)
AVDD_PHY: length 3
  TOP w0.203: U8.31 v1(15.61,24.96)
  BOTTOM w0.254: FB11.1 C84.1 C85.1 15.02,24.96 v1(15.61,24.96)
GND: length 256.3
  TOP w0.203: 15.16,23.46 U8.2 ; 15.16,23.46 16.16,22.46 U8.33 15.61,23.46 15.16,23.46
  TOP w0.254: 9.29,2.82 SW2.1 ; SW2.1 10.8,1.82 ; SW2.1 12.3,2.82 ; SW2.1 10.8,3.83 ; 41.12,31.11 SW1.1 ; SW1.1 42.12,32.61 ; SW1.1 40.11,32.61 ; SW1.1 41.12,34.11 ; 8,27.4 J4.7 ; J4.7 9.71,27.4 ; J4.7 8.85,26.8 ; J4.7 8.85,28 ; 33.93,10.09 C68.1 ; C68.1 34.61,9.41 ; C68.1 33.9,9.37 ; C72.1 v1(14.58,4.45) ; C72.1 14.58,5.78 ; C72.1 15.1,5.3 ; 12.85,13.44 U7.2 ; U7.2 13.76,13.44 ; U7.2 13.31,12.44 ; 15.83,8.54 Y1.4 ; Y1.4 16.82,7.54 ; Y1.4 15.79,7.51 ; Y1.4 16.86,8.57 ; C100.2 15.99,5.76 ; C100.2 16.46,5.23 ; C100.2 15.99,4.7 ; C100.2 15.51,5.23 ; U6.4 42.47,15.84 ; U6.4 41.97,17.05 ; U6.4 41.26,16.33 ; U6.4 40.76,17.54 ; 32.83,17.3 C70.1 ; C70.1 33.55,17.34 ; C70.1 32.87,18.02 ; C70.1 33.58,18.05 ; 37.12,5.91 J9.9 38.1,5.05 ; 11.58,13.44 U7.3 ; U7.3 12.49,13.44 ; U7.3 12.04,12.44 ; J9.6 40.85,5.71 ; J9.6 40.85,3.7 ; J9.6 39.55,4.71 ; J9.6 42.16,4.71 ; R13.2 34.54,1.68 ; R13.2 33.58,1.68 ; R13.2 34.06,1.15 ; R13.2 34.06,2.21 ; Y1.2 19.26,8.78 ; Y1.2 18.23,8.75 ; Y1.2 18.2,7.72 ; 39.16,9.63 J9.5 37.3,9.63 ; U7.4 11.22,13.44 ; U7.4 10.77,14.45 ; U7.4 10.31,13.44 ; 15.7,9.1 C69.1 ; C69.1 15.66,9.81 ; C69.1 16.41,9.06 ; C69.1 16.38,9.78 ; 21.03,2.36 C74.1 ; C74.1 21.51,1.83 ; C74.1 21.51,2.89 ; 34.56,10.73 C64.1 ; C64.1 35.27,10.76 ; C64.1 35.23,10.05 ; U7.1 15.03,13.44 ; U7.1 14.58,12.44 ; U7.1 14.12,13.44 ; v1(39.29,4.98) 38.36,5.91 37.02,5.91 ; J9.7 42.16,11.96 ; J9.7 39.55,11.96 ; J9.7 40.85,12.96 ; J9.7 40.85,10.95 ; 37.12,10.76 J9.8 ; J9.8 39.08,10.76 ; J9.8 38.1,11.61 ; 19.35,9.41 C67.1 18.64,9.38
  TOP w0.305: J3.6 v1(34.01,22.89)
  TOP w0.381: J3.6 34.01,25.45 34.21,25.65
  L2_GND w0.254: 40.85,10.95 J9.7 ; J9.7 42.16,11.96 ; J9.7 39.55,11.96 ; J9.7 40.85,12.96 ; 38.1,9.9 J9.8 ; J9.8 39.08,10.76 ; J9.8 38.1,11.61 ; J9.8 37.12,10.76 ; J9.6 42.16,4.71 ; J9.6 40.85,3.7 ; J9.6 40.85,5.71 ; J9.6 39.55,4.71 ; J9.9 38.1,6.76 ; J9.9 37.12,5.91 ; J9.9 38.1,5.05
  L3_PWR w0.254: J9.9 38.1,6.76 ; J9.9 37.12,5.91 ; J9.9 38.36,5.91 v1(39.29,4.98) ; J9.9 38.1,5.05 ; 40.85,3.7 J9.6 ; J9.6 39.55,4.71 ; J9.6 42.16,4.71 ; J9.6 40.85,5.71 ; 37.12,10.76 J9.8 ; J9.8 38.1,11.61 ; J9.8 39.08,10.76 ; J9.8 38.1,9.9 ; 40.85,10.95 J9.7 ; J9.7 39.55,11.96 ; J9.7 40.85,12.96 ; J9.7 42.16,11.96
  BOTTOM w0.127: v1(42.34,24.82) 41.67,24.15 41.67,23.49 ; v1(28.47,32.62) 28.47,32.62 ; v1(21.42,9.66) 21.42,9.72
  BOTTOM w0.254: C116.2 23.58,11.85 v1(23.86,12.13) 24.19,12.46 C38.2 ; C116.2 23.08,12.19 ; C116.2 23.05,11.47 ; C116.2 23.76,11.51 ; C90.1 14.41,27.28 ; C90.1 13.45,27.28 ; C90.1 13.93,26.75 ; C90.1 13.93,27.81 ; J18.10 28.35,4.65 ; J18.10 27.85,3.85 ; J18.10 27.85,5.46 ; J18.10 27.35,4.65 ; 24.33,6.35 C80.1 ; C80.1 25.29,6.35 ; C80.1 24.81,6.88 ; C80.1 24.81,5.82 ; 22.39,31.9 C18.2 ; C18.2 22.92,32.38 ; C18.2 22.92,31.42 ; 19.61,12.09 C120.2 20.57,12.09 ; 16.51,31.15 C8.2 ; C8.2 15.98,31.63 ; C8.2 16.51,32.1 ; C105.2 33.78,10.24 ; C105.2 32.93,11.09 ; C105.2 33,10.31 ; C105.2 33.71,11.02 ; 37.12,5.91 J9.9 ; J9.9 38.1,5.05 ; J9.9 38.1,6.76 ; C26.2 24.89,13.04 v1(24.58,12.74) 24.31,12.46 C38.2 ; C26.2 24.55,13.42 ; C26.2 25.23,12.74 ; C26.2 24.98,13.08 v1(25.28,13.39) 25.61,13.71 C60.2 ; C107.2 20.99,10.1 v1(21.42,9.66) ; C107.2 20.79,10.6 ; C107.2 20.18,10.1 ; C107.2 20.79,9.59 ; 38.37,20.66 C99.2 ; C99.2 38.85,21.19 ; C99.2 37.9,21.19 ; R59.2 40.46,31.95 ; R59.2 39.99,31.42 ; R59.2 39.99,32.48 ; R59.2 39.51,31.95 ; 20.85,3.85 J18.24 ; J18.24 21.35,4.65 ; J18.24 20.35,4.65 ; J18.24 20.85,5.46 ; J18.16 24.85,5.46 ; J18.16 25.35,4.65 ; J18.16 24.35,4.65 ; J18.1 32.85,1.95 ; J18.1 32.35,2.76 ; J18.1 32.35,1.15 ; J18.1 31.85,1.95 ; J18.7 29.85,1.95 ; J18.7 28.85,1.95 ; J18.7 29.35,1.15 ; J18.7 29.35,2.76 ; C101.2 33.33,26.67 ; C101.2 32.37,26.67 ; C101.2 32.85,27.2 ; 17.68,25.3 C88.1 ; C88.1 18.15,25.83 ; C88.1 17.2,25.83 ; C88.1 17.68,26.36 ; C58.2 30.62,11.81 ; C58.2 29.94,11.13 ; C58.2 30.28,11.5 v1(29.94,11.84) 29.58,12.2 C57.2 ; C49.2 28.32,6.74 C50.2 ; C49.2 27.89,6.25 ; C49.2 28.68,6.32 ; C49.2 27.97,7.03 ; 40.85,10.95 J9.7 ; J9.7 42.16,11.96 ; J9.7 40.85,12.96 ; 32.85,25.3 C81.2 32.37,25.83 ; C56.2 28.58,10.43 ; C56.2 28.09,10.77 v1(27.83,10.52) 27.51,10.19 C55.2 ; C56.2 27.9,11.11 ; 25.27,14.13 C60.2 ; C60.2 25.64,13.79 v1(25.97,14.11) 26.31,14.46 C104.2 ; C60.2 25.95,13.45 ; C102.2 42.08,6.58 ; C102.2 41.07,6.58 ; C102.2 41.57,7.18 ; C102.2 41.57,5.98 ; C39.2 30.56,14.53 v1(30.15,14.12) ; C39.2 31.31,15.18 C27.2 ; C39.2 31.01,14.19 ; C39.2 30.33,14.87 ; 29.15,12.71 C57.2 ; C57.2 29.22,11.92 ; C57.2 29.58,12.31 v1(29.89,12.62) 30.22,12.95 C118.2 30.42,13.14 v1(30.88,13.14) ; 38.85,22.04 C98.2 37.9,22.04 ; C93.2 41.9,32.24 ; C93.2 41.37,31.76 ; C93.2 41.37,32.72 ; C93.2 40.84,32.24 ; C3.2 12.12,26.28 ; C3.2 11.59,26.76 ; C3.2 11.59,25.8 ; 29.62,8.88 C36.2 ; C36.2 29.96,9.18 C31.2 v1(30.91,8.23) ; C36.2 30.29,9.56 ; 19.14,15.4 C23.1 ; C23.1 19.67,14.92 ; C23.1 R19.1 ; C23.1 19.67,15.88 ; 15.93,23.73 C86.2 15.93,22.72 ; 34.24,29.89 U10.7 36.25,29.89 ; 15.78,17.2 R51.2 ; R51.2 15.3,17.73 ; R51.2 16.26,17.73 ; 17.31,3.3 J18.26 ; J18.26 18.56,2.05 ; J18.26 18.56,4.56 ; J7.1 39.61,17.36 ; J7.1 37.9,17.36 ; J7.1 38.76,17.96 ; J7.1 38.76,16.75 ; 30.43,6.53 C52.2 ; C52.2 30.96,6.05 ; C52.2 30.96,7.01 ; R3.1 6.35,23.52 ; J18.20 22.85,5.46 ; J18.20 22.35,4.65 ; J18.20 22.85,3.85 ; J18.20 23.35,4.65 ; J18.4 31.35,4.65 ; J18.4 30.35,4.65 ; J18.4 30.85,5.46 ; J18.4 30.85,3.85 ; 11.43,35.97 C111.2 ; C111.2 12.04,36.47 ; C111.2 12.64,35.97 ; R48.2 14.65,20.85 ; R48.2 14.65,19.89 ; R48.2 15.18,20.37 ; C51.2 32.62,6.48 ; C51.2 32.01,5.98 ; C51.2 32.01,6.98 ; C95.2 38.1,32.56 ; C95.2 38.1,31.35 ; C95.2 37.6,31.95 ; 28.17,16.1 C45.2 ; C45.2 28.92,16.84 ; C45.2 28.21,16.81 ; C45.2 28.89,16.13 ; 14.35,33.54 U11.2 14.35,35.55 ; 14.07,26.56 C84.2 14.07,25.56 ; 21.19,15.91 C103.2 21.79,15.41 ; 15.49,36.12 C113.2 ; C113.2 15.97,36.65 ; C113.2 15.97,35.59 ; C113.2 16.45,36.12 ; C38.2 24.59,12.12 ; C38.2 23.91,12.8 ; 17.8,23.81 R58.2 17.8,22.85 ; C104.2 26.8,14.88 ; C104.2 26.73,14.1 ; C104.2 26.01,14.81 ; C77.2 30.94,32.62 ; C77.2 30.46,33.14 ; C77.2 29.99,32.62 ; 14.44,23.55 C92.2 14.92,24.08 ; 24.01,15.83 C59.2 23.33,15.15 ; C50.2 29.33,7.07 ; C50.2 29.36,7.78 ; C50.2 28.65,7.74 ; 37.9,22.93 R70.1 38.85,22.93 ; C55.2 27.75,9.83 ; C55.2 27.04,10.55 ; R47.2 21.33,21.67 ; R47.2 R46.2 v1(21.48,22.48) ; R47.2 20.37,21.67 ; R47.2 20.87,21.64 v1(21.48,21.64) ; R47.2 20.85,21.14 ; 30.98,15.53 C27.2 ; C27.2 31.69,15.56 ; C27.2 31.65,14.85 ; 20.53,14.92 R19.1 ; R19.1 21.06,15.4 ; R19.1 20.53,15.88 ; J9.6 40.85,5.71 ; J9.6 42.16,4.71 ; J9.6 40.85,3.7 ; J9.6 39.55,4.71 ; 21.85,9.67 C65.2 ; C65.2 21.42,9.72 ; C65.2 21.85,10.63 ; C65.2 22.38,10.15 ; 33.23,12.24 C54.2 ; C54.2 33.91,11.56 ; C54.2 33.19,11.52 ; C54.2 34.27,12.6 C53.2 ; 28.47,32.62 R12.1 ; R35.1 20.94,7.89 ; R35.1 20.46,8.42 ; R35.1 19.98,7.89 ; 8.83,7.22 J38.2 ; J38.2 10.09,7.73 ; J38.2 11.34,7.22 ; J38.2 10.09,6.72 ; C48.2 22.61,9.4 ; C48.2 21.93,8.72 ; C48.2 22.65,8.68 ; C48.2 21.9,9.43 ; 16.1,26.06 C89.1 ; C89.1 16.63,26.54 ; C89.1 16.1,27.02 ; C89.1 15.57,26.54 ; C53.2 34.62,12.24 ; C53.2 34.7,13.03 ; C53.2 33.91,12.96 ; R6.1 21.85,34.35 ; 7.83,26.87 C5.2 7.22,27.38 ; 16.87,22.79 C87.2 16.87,23.75 ; 34.64,2.05 J18.25 ; J18.25 35.89,3.3 ; J18.25 34.64,4.56 ; J18.25 33.39,3.3 ; C85.2 15.54,26.01 ; C85.2 15.01,25.53 ; C85.2 15.01,26.49 ; R9.1 12.44,20.93 ; C61.2 32.64,10.94 ; C61.2 32.61,11.65 ; C61.2 31.93,10.98
  vias: v1(5.61,34.42) v1(5.61,33.61) v1(5.61,32.95) v1(5.61,30.46) v1(5.61,27.76) v1(5.61,25.83) v1(5.61,24.28) v1(5.61,21.97) v1(5.61,20.98) v1(5.61,19) v1(5.61,13.57) v1(5.61,12.17) v1(5.61,9.5) v1(5.61,8.18) v1(5.61,6.71) v1(5.61,3.43) v1(6.35,33.83) v1(7.01,33.68) v1(7.72,33.45) v1(7.79,27.31) v1(7.79,26.85) v1(7.79,11.1) v1(7.79,10.54) v1(7.91,4.45) v1(8.43,13.34) v1(8.45,0.61) v1(8.96,37.39) v1(9.24,3.4) v1(9.72,0.61) v1(9.78,25.45) v1(9.79,16.4) v1(10.13,1.42) v1(10.74,0.61) v1(11.1,16.97) v1(11.12,16.46) v1(11.54,1.32) v1(11.64,21.02) v1(11.69,22.47) v1(11.76,0.61) v1(12.21,29.92) v1(12.26,26.49) v1(12.39,28.6) v1(12.67,37.39) v1(12.77,0.61) v1(12.95,2.16) v1(13.2,37.39) v1(13.59,1.27) v1(13.92,13.49) v1(13.92,0.61) v1(14.25,12.02) v1(14.35,33.38) v1(14.56,28.5) v1(14.73,27.61) v1(14.75,26.65) v1(14.88,33.38) v1(14.89,16.87) v1(15.01,9.42) v1(15.06,0.61) v1(15.19,37.39) v1(15.16,18.16) v1(15.31,7.63) v1(15.48,4.45) v1(15.69,22.25) v1(15.69,21.31) v1(15.73,1.89) v1(15.85,19.25) v1(15.95,22.76) v1(16.05,27.03) v1(16.1,37.39) v1(16.23,10.64) v1(16.18,6.53) v1(16.2,0.61) v1(16.32,16.87) v1(16.25,14.14) v1(16.28,13.44) v1(16.48,31.04) v1(16.68,22.1) v1(16.79,22.79) v1(16.94,37.39) v1(17.22,25.6) v1(17.34,26.6) v1(17.29,16.87) v1(17.34,0.61) v1(17.57,22.79) v1(17.57,22.1) v1(17.6,21.39) v1(17.59,11.65) v1(17.62,10.63) v1(17.79,19.49) v1(17.75,18.17) v1(18.36,0.61) v1(18.49,32.69) v1(18.59,26.54) v1(18.77,37.39) v1(18.77,30.51) v1(19,32.69) v1(19.26,14.34) v1(19.39,11.66) v1(19.38,0.61) v1(19.49,19.62) v1(19.63,37.39) v1(19.71,14.35) v1(19.66,7.56) v1(19.91,25.5) v1(20.13,19.67) v1(20.14,14.35) v1(20.29,5.78) v1(20.39,34.55) v1(20.37,8.65) v1(20.52,0.61) v1(21.03,37.39) v1(21.23,34.52) v1(21.43,18.52) v1(21.58,20.24) v1(21.6,5.77) v1(21.81,0.61) v1(21.94,12.57) v1(22.04,34.55) v1(22.04,20.72) v1(22.14,27.69) v1(22.07,22.49) v1(22.22,30.28) v1(22.21,5.77) v1(22.3,37.39) v1(22.3,28.71) v1(22.5,21.12) v1(22.55,15.47) v1(22.63,11.65) v1(22.65,0.61) v1(22.81,31.32) v1(23.44,10.97) v1(23.57,37.39) v1(23.67,26.09) v1(23.71,7.86) v1(23.72,0.61) v1(24.23,19.84) v1(24.24,11.15) v1(24.43,37.39) v1(24.36,21.17) v1(24.42,9.32) v1(24.55,7.04) v1(24.49,3.73) v1(24.68,22.47) v1(24.74,19.84) v1(24.67,15.3) v1(24.67,11.66) v1(25.02,32.74) v1(25.12,34.34) v1(25.09,26.16) v1(25.09,25.55) v1(25.08,15.71) v1(25.14,0.61) v1(25.19,30.56) v1(25.22,23.94) v1(25.32,37.39) v1(25.27,22.45) v1(25.27,19.84) v1(25.33,12.23) v1(25.28,8.99) v1(25.7,30.15) v1(25.71,12.69) v1(25.74,11.85) v1(25.76,11.23) v1(25.79,5.61) v1(26.07,10.05) v1(26.23,37.39) v1(26.29,13.21) v1(26.29,0.61) v1(26.41,29.8) v1(26.4,12.61) v1(26.42,11.91) v1(26.37,11.18) v1(26.41,10.45) v1(26.39,3.7) v1(26.41,2.97) v1(26.64,8.65) v1(26.74,34.39) v1(26.72,27.18) v1(26.69,18.76) v1(26.78,13.7) v1(26.82,10.72) v1(26.77,7.68) v1(26.93,12.42) v1(27.09,18.41) v1(27.15,13.35) v1(27.1,11.91) v1(27.19,15.56) v1(27.17,11.2) v1(27.24,5.88) v1(27.31,14.15) v1(27.38,37.39) v1(27.43,0.61) v1(27.47,12.93) v1(27.64,14.47) v1(27.76,11.79) v1(27.92,13.93) v1(27.97,13.42) v1(28.1,18.94) v1(28.22,16.12) v1(28.52,37.39) v1(28.48,13.94) v1(28.52,5.56) v1(28.57,0.61) v1(28.77,27.71) v1(28.76,19.75) v1(28.88,34.37) v1(28.98,9.16) v1(29.14,2.96) v1(29.21,33.12) v1(29.45,6.35) v1(29.56,27.28) v1(29.7,0.61) v1(29.87,32.67) v1(30.32,7.3) v1(30.54,34.34) v1(30.45,33.25) v1(30.45,26.54) v1(30.62,3.59) v1(30.84,0.61) v1(31.82,37.39) v1(31.92,8.95) v1(31.9,5.69) v1(31.99,0.61) v1(32.2,34.37) v1(32.52,3.3) v1(32.68,32.72) v1(32.68,30.61) v1(32.84,37.39) v1(32.83,17.23) v1(32.91,18.91) v1(32.9,18.28) v1(32.98,8.59) v1(33.05,6.41) v1(33.22,3.9) v1(33.37,0.61) v1(33.55,27.18) v1(33.55,26.31) v1(33.5,5.37) v1(33.61,16.09) v1(33.73,37.39) v1(33.73,27.99) v1(33.83,32.72) v1(34.01,29.9) v1(34.1,5.96) v1(34.13,3.63) v1(34.27,13.63) v1(34.31,3.15) v1(34.54,11.81) v1(34.55,0.61) v1(34.74,37.39) v1(34.72,2.74) v1(34.87,26.85) v1(34.95,11.28) v1(35.1,12.94) v1(35.09,9.64) v1(35.24,20.31) v1(35.31,32.35) v1(35.33,31.31) v1(35.44,17.95) v1(35.44,10.79) v1(35.4,0.61) v1(35.48,21.89) v1(35.53,11.89) v1(35.53,4.6) v1(35.63,37.39) v1(35.63,27.91) v1(35.65,7.29) v1(35.86,5.46) v1(36.05,8.8) v1(36.34,29.92) v1(36.27,0.61) v1(36.37,31.27) v1(36.62,26.97) v1(36.62,22.75) v1(36.57,19.75) v1(36.56,18.9) v1(36.62,6.86) v1(36.81,34.02) v1(36.83,25.45) v1(36.8,6.25) v1(36.8,5.51) v1(36.85,28.3) v1(37.04,0.61) v1(37.31,16.01) v1(37.26,14.38) v1(37.26,13.3) v1(37.27,12.1) v1(37.54,2.39) v1(37.69,30.58) v1(37.82,25.81) v1(37.97,26.57) v1(38.02,0.61) v1(38.1,31.17) v1(38.19,29.88) v1(38.44,20.56) v1(38.45,28.32) v1(38.52,16.52) v1(38.71,26.07) v1(38.71,17.91) v1(38.93,37.39) v1(39.06,22.62) v1(39.06,21.93) v1(39.07,21.3) v1(39.06,0.61) v1(39.24,4.01) v1(39.7,28.04) v1(39.67,26.62) v1(39.67,9.66) v1(39.7,8.88) v1(39.84,24.68) v1(41.47,10.39) v1(42.34,23.29) v1(42.34,19.74) v1(42.39,34.16) v1(42.39,31.15) v1(42.39,29.92) v1(42.39,28.77) v1(42.39,27.88) v1(42.39,27) v1(42.39,21.46) v1(42.39,17.29) v1(42.39,15.8) v1(42.39,14.14) v1(42.39,12.65) v1(42.39,11.06) v1(42.39,9.59) v1(42.39,8.35) v1(42.39,6.96) v1(42.39,5.92) v1(42.39,4.81) v1(42.39,3.94)
VCC_0V8: length 36.4
  L3_PWR w0.305: v1(29.99,21.3) 30.91,20.38 30.91,18.11 32.3,16.71 32.3,15.25 33.13,14.43 33.13,9.45 32.09,8.41 31.54,8.41 31.09,8.86 29.68,8.86 28.98,8.17 26.41,8.17 v1(26.26,8.02)
  L3_PWR w0.381: v1(29.99,21.3) 27.16,24.13 v1(27.16,25.06)
  BOTTOM w0.203: 27,28.07 28.47,29.54 C16.2 R11.2
  BOTTOM w0.305: v1(29.99,21.3) 29.99,19.28 FB22.2 ; FB14.2 v1(26.26,8.02)
VCC_1V8: length 73.7
  TOP w0.178: R77.1 19.52,5.23 v1(19.54,5.21)
  L3_PWR w0.381: 25.49,7.51 25.49,7.21 25.32,7.05 ; 25.49,7.51 v1(25.49,8.41) ; 25.49,7.51 25.94,7.05 ; 18.47,11.94 18.47,11.47 ; 18.47,11.94 20.8,14.26 20.8,16.27 23.29,18.76 23.29,24.3 19.88,27.71 v1(17.34,27.71) ; 18.47,11.94 18.28,11.75 v1(18.2,11.75) 18.47,11.47 ; 18.47,11.47 18.47,6.27 v1(19.54,5.21) 23.48,5.21 25.32,7.05 ; 25.94,7.05 29.58,7.05 29.99,6.64 31.69,6.64 32.1,7.05 33.31,7.05 ; 25.94,7.05 25.32,7.05 ; 33.31,7.05 33.85,7.05 ; 33.31,7.05 33.7,7.45 ; 33.85,7.05 34.1,7.05 ; 33.85,7.05 33.7,7.2 33.7,7.45 ; 34.1,7.05 33.7,7.45 ; 34.1,7.05 v1(34.59,7.05) ; v1(32.95,15.48) 33.7,14.73 33.7,7.45
  BOTTOM w0.203: 18.41,27.18 17.35,27.18 TP13.1
  BOTTOM w0.305: FB19.1 v1(32.95,15.48) ; v1(34.59,7.05) 34.59,7.37 ; 34.59,7.37 34.59,7.77 ; 34.59,7.37 34.38,7.57 ; FB20.1 34.59,9.15 34.59,7.77 ; 34.59,7.77 34.38,7.57 ; 34.38,7.57 FB15.2 ; FB23.2 20.61,13.93 20.02,13.35 FB17.2 18.87,12.95 18.2,12.28 v1(18.2,11.75) 18.2,11.43 FB18.2 ; FB16.2 25.61,8.41 v1(25.49,8.41) R60.1
VCC_3V3: length 77.4
  TOP w0.178: C72.2 14.77,6.53 v1(15.43,6.53) ; D2.1 v1(38.24,1.68)
  TOP w0.203: v1(21.38,23.55) 21.14,23.55 R49.2 ; v1(17.06,19.81) 16.81,20.07 U8.13
  TOP w0.254: R66.1 40.74,13.97 39.57,12.8 36.9,12.8 R67.1
  TOP w0.305: R31.2 10.9,5.32 v1(11.32,5.75) 11.75,5.32 R32.2 R30.1 ; v1(39.34,23.7) R71.2 40.09,20.7 v1(34.88,15.49) ; C72.2 U7.8
  TOP w0.381: v1(33.18,16.71) 33.71,16.71 C70.2 34.38,17.37 34.38,18.54 U6.8 ; R67.1 v1(35,13.74)
  TOP w0.406: R88.1 v1(20.07,3.49)
  L3_PWR w0.254: 20.84,2.93 21.93,1.84 27.19,1.84 27.92,1.1 37.66,1.1 v1(38.24,1.68)
  BOTTOM w0.203: R85.1 13.4,35.88 U11.1 ; R69.2 38.47,23.7 v1(39.34,23.7) ; C4.1 R2.2 6.35,26.01 6.35,27.71 6.6,27.97 7.22,27.97 ; R45.2 21.08,23.55 v1(21.38,23.55)
  BOTTOM w0.254: v1(17.06,19.81) 17.06,20.88 16.18,21.77 R44.2 ; R72.1 13.35,8.23 v1(13.35,8.72) R73.1 ; v1(11.32,5.75) 10.85,6.22 J38.1 ; v1(12.37,24.56) 12.37,25.45 12.99,26.07 FB11.2
  BOTTOM w0.305: R68.2 33.53,17.06 v1(33.18,16.71) 32.65,16.71 32.22,16.28 32.22,14.55 31.96,14.3 ; 29.74,13.63 29.31,13.63 FB21.1 ; 29.74,13.63 31.29,13.63 31.71,14.05 ; 29.74,13.63 R33.1 ; R44.2 R55.2 ; 31.96,14.05 31.71,14.05 ; 31.96,14.05 31.96,14.3 ; 31.96,14.05 R64.2 ; 31.71,14.05 31.96,14.3
  BOTTOM w0.457: Q1.2 31.5,30.97 R42.1 C77.1 v1(31.5,33.39)
  vias: v1(11.91,32.28) v1(11.98,32.72) v1(12.26,33.1) v1(12.72,33.17) v1(12.87,33.66)
VCC_5V: length 7
  BOTTOM w0.203: R1.1 10.44,23.43 U1.4 ; R4.1 17.22,34.42 17.45,34.65 ; R8.1 C13.1 10.05,20.61 10.05,20.88 ; R10.1 22.92,35.52 23.08,35.69
  BOTTOM w0.254: C102.1 40.48,7.11 ; C102.1 40.06,6.58 ; C102.1 40.48,6.05
  BOTTOM w0.381: R74.2 38.85,33.12 v1(39.62,33.12)
  vias: v1(6.68,19.46) v1(6.68,18.62) v1(7.11,18.98) v1(7.57,19.43) v1(7.59,18.65) v1(13.04,4.64) v1(13.01,4.11) v1(22.25,36.76) v1(22.25,35.99) v1(22.78,36.35) v1(23.31,36.73) v1(23.34,36.02) v1(39.19,6.4) v1(39.44,6.91) v1(39.47,5.92) v1(39.72,6.4) v1(40.83,19.02) v1(40.85,18.26) v1(41.63,19.01) v1(41.64,18.25)
VCC_12V: length 4
  BOTTOM w0.203: TP2.1 15.03,15.72 R7.1 13.18,16 11.55,16 11.3,15.75
  vias: v1(10.51,10.44) v1(10.56,11.03) v1(10.82,10.03) v1(11.1,11.03) v1(11.1,10.39)
VCC_DDR: length 2.8
  BOTTOM w0.203: 21.15,30.02 21.85,30.72 R5.1 C6.1
VDD: length 13.9
  TOP w0.178: v1(23.14,13.61) 22.67,13.61 U12.83 ; v1(29.66,14.63) 29.66,14.88 U12.55 ; v1(24.02,9.87) 23.66,9.87 U12.10 ; v1(31.78,9.66) 31.78,9.95 U12.39 ; U12.72 v1(25.53,16.21)
  BOTTOM w0.254: v1(29.66,14.63) 29.66,15 C39.1 30.58,15.91 C27.1
  BOTTOM w0.305: v1(25.53,16.21) 25.53,16.98 C37.1 C43.1 ; C36.1 30.69,9.92 C31.1 31.43,9.31 v1(31.78,9.66) ; C26.1 23.53,13.2 C38.1 23.14,13.58 v1(23.14,13.61) ; C42.1 24.88,9.73 C40.1 24.02,10.1 v1(24.02,9.87)
  BOTTOM w0.381: C27.1 30.58,16.09 C35.1
  vias: v1(25.9,22.44) v1(26.32,22.44) v1(26.76,22.44) v1(27.2,22.44)
VDDIO1: length 11.6
  TOP w0.178: v1(22.35,13.03) 22.35,13.45 U12.84 ; v1(28.86,15.33) 29.11,15.08 29.37,15.08 U12.56
  L3_PWR w0.305: v1(22.35,13.03) 24.01,13.03 26.03,15.05 27.44,15.05 27.72,15.33 v1(28.86,15.33)
  BOTTOM w0.305: R33.2 28.86,14.65 v1(28.86,15.33) 29.27,15.74 C45.1 ; C116.1 22.69,12.69 v1(22.35,13.03)
VDDIO2: length 2.8
  TOP w0.178: U12.40 v1(31.03,11.2)
  BOTTOM w0.305: v1(31.03,11.2) 31.03,12.15 C118.1 31.59,12.84 R64.1
VDDIO_D: length 2.4
  TOP w0.178: v1(23.34,10.36) 23.34,10.04 U12.9
  BOTTOM w0.305: R60.2 23.01,9.63 C48.1 23.01,10.03 v1(23.34,10.36)
VDDIO_OSC: length 2.7
  TOP w0.178: U12.3 21.93,11.6 v1(21.93,11.99)
  BOTTOM w0.305: v1(21.93,11.99) 21.23,11.99 C120.1 21.12,12.09 FB17.1
VDDMSC0: length 13.6
  TOP w0.457: J3.4 v1(31.81,25.31)
  BOTTOM w0.203: v1(31.81,25.31) 31.8,25.31 31.8,24.89 ; 31.96,24.74 33.4,24.74 33.64,24.98 33.64,25.45 R37.1 33.64,25.52 34.39,26.27 R39.1 ; 31.96,24.74 31.81,24.89 31.8,24.89 ; 31.96,24.74 31.8,24.59 ; 31.8,24.59 31.8,24.89 ; 31.8,24.59 31.8,23.93 31.51,23.64 30.71,23.64 R38.1 29.59,23.64 R41.1 28.5,23.64 R40.1
  BOTTOM w0.457: Q1.3 31.81,27.01 C101.1 C81.1 31.81,25.83 v1(31.81,25.31)
ADC0: length 7
  TOP w0.102: TP12.1 34.01,6.36 33.05,7.32 31.2,7.32 30.21,8.31 29.96,8.31 U12.32
ADC_AVDD: length 4.4
  TOP w0.178: U12.34 29.66,9.6 v1(29.41,9.6) 29.41,9.35 U12.33
  BOTTOM w0.305: FB16.1 27.46,8.71 C55.1 28.79,10.04 C56.1 v1(29.41,9.6)
BOOTSEL0: length 44
  TOP w0.102: v1(20.32,24.66) 24.58,28.93 40.03,28.93 41.12,27.84 SW1.2 41.13,25.6 R71.1 ; U12.67 25.64,18.57 23.01,18.57 21.31,16.87 v1(18.91,16.87)
  BOTTOM w0.102: v1(20.32,24.66) 19.82,24.17 19.67,24.17 18.77,23.27 18.77,17.01 v1(18.91,16.87)
CODEC_AVDD: length 4.2
  TOP w0.178: U12.43 v1(31.75,11.97)
  BOTTOM w0.305: FB19.2 33.51,13.38 C53.1 32.83,12.71 C54.1 32.41,12.63 v1(31.75,11.97)
DDR_VREF: length 5.9
  TOP w0.178: U12.77 23.35,15.91 v1(22.87,15.91)
  BOTTOM w0.254: C21.1 C23.2 R19.2 ; R19.2 22.34,16.44 v1(22.87,15.91) ; R19.2 R17.1
DDRPLL_AVD08: length 4
  TOP w0.178: U12.78 23.83,14.94 v1(24.22,14.94)
  BOTTOM w0.305: FB22.1 26.22,15.85 C104.1 25.58,15.23 C60.1 24.63,14.52 v1(24.22,14.94)
DDRPLL_AVD18: length 3.9
  TOP w0.178: v1(23.66,14.34) 23.66,14.61 U12.79
  BOTTOM w0.305: v1(23.66,14.34) 23.24,14.76 C59.1 21.85,14.76 C103.1 21.79,13.97 FB23.1
DDRVDD: length 7.9
  TOP w0.178: 23.96,15.79 23.42,16.33 v1(23.26,16.33) ; v1(23.58,16.59) 23.66,16.59 U12.75
  BOTTOM w0.305: C21.2 R17.2 20.63,18.3 C22.1 20.63,20.03 22.32,21.72 R34.1
EXCLKI: length 6.5
  TOP w0.102: Y1.1 18.42,6.94 19.75,8.27 C67.2 R20.2 20.91,10.19 21.5,10.19 U12.5
EXCLKO: length 3.1
  TOP w0.102: R21.2 19.12,11.01 R20.1 19.75,10.49 21.31,10.49 U12.4
FX: length 2.1
  TOP w0.102: R53.2 19.68,21.86 v1(19.16,21.86) U8.19
  BOTTOM w0.102: R47.1 19.62,21.86 v1(19.16,21.86)
GMAC_CLKOUT: length 19.1
  TOP w0.102: U12.62 28.79,17.47 28.79,19.19 27.29,20.69 22.56,20.69 20.94,19.06 16.2,19.06 R22.2 15.39,18.89 15.39,19.99 15.61,20.21 U8.10
GMAC_CRS_DV: length 13.7
  TOP w0.102: U12.59 29.69,16.89 29.69,20.15 27.8,22.05 R53.1
GMAC_MDC: length 1.3
  TOP w0.102: U8.22 19.73,23.06 R26.2
GMAC_MDIO: length 18.4
  TOP w0.102: 29.58,15.79 30.17,16.38 30.17,20.47 27.3,23.34 22.27,23.34 21.36,24.26 20.36,24.26 R49.1 19.55,23.46 U8.23
GMAC_RST_N: length 25.9
  TOP w0.102: U8.32 15.21,24.28 15.06,24.13 v1(13.89,24.13) 12.64,22.89 11.17,22.89 10.61,22.33 10.61,15.27 11.34,14.54 16.49,14.54 16.79,14.25 18.21,14.25 18.51,13.94 21.35,13.94 U12.85
  BOTTOM w0.102: v1(13.89,24.13) 13.89,23.56 C92.1 R55.1
GMAC_RXD0: length 13.2
  TOP w0.102: R50.1 20.99,21.26 21.64,21.26 22.17,21.79 27.66,21.79 29.43,20.02 29.43,17.13 U12.60
GMAC_RXD1: length 12.9
  TOP w0.102: U12.61 29.19,17.38 29.19,19.91 27.56,21.55 22.34,21.55 21.1,20.32 R52.1
GMAC_TXD0: length 1.5
  TOP w0.102: U8.9 15.21,20.15 R23.2
GMAC_TXD1: length 1
  TOP w0.102: R24.2 13.77,21.06 U8.8
GMAC_TXEN: length 1.1
  TOP w0.102: U8.5 14.01,22.26 R25.2
HPOUT: length 19.2
  TOP w0.178: U12.44 32.68,11.53 33.26,11.53 34.13,12.4 v1(36.04,12.4)
  BOTTOM w0.203: v1(36.04,12.4) 36.04,23.99 37.3,25.25 C94.2
I2C0_SCK: length 13
  TOP w0.102: U12.12 22.84,8.06 22.84,5.38 23.63,4.59 23.63,3.57 25.85,1.35 v1(25.85,1.09)
  BOTTOM w0.102: J18.14 v1(25.85,1.09)
I2C0_SDA: length 10.6
  TOP w0.102: v1(26.77,1.09) 26.29,1.57 26.07,1.57 23.96,3.68 23.96,4.7 23.15,5.51 23.15,7.87 U12.13
  BOTTOM w0.102: v1(26.77,1.09) 26.77,1.53 J18.13
I2C1_SCK: length 13.8
  TOP w0.102: R32.1 12.04,6.41 U7.6 12.04,9.07 13.81,10.85 14.66,10.85 17.15,13.34 20.97,13.34 U12.87
I2C1_SDA: length 14.4
  TOP w0.102: v1(12.14,9.96) 10.77,8.59 U7.5 10.77,6.41 R31.1 ; v1(14.08,10.33) 14.55,10.33 17.26,13.03 20.78,13.03 U12.88
  BOTTOM w0.102: v1(12.14,9.96) 12.51,10.33 v1(14.08,10.33)
IR: length 30.3
  TOP w0.102: v1(18.69,14.41) 19.03,14.76 22.03,14.76 U12.82
  BOTTOM w0.102: J18.23 21.35,1.26 21.15,1.07 14.63,1.07 14,1.69 12.24,1.69 11.49,2.44 11.49,4.81 17.05,10.37 17.05,12.4 18.68,14.03 18.68,14.4 v1(18.69,14.41)
IRCUTN: length 26.1
  TOP w0.102: U12.2 20.91,11.07 20.62,11.07 19.44,12.26 17.2,12.26 14.08,9.13 14.08,2.81 15.58,1.31 19.29,1.31 v1(20.25,2.27)
  BOTTOM w0.102: J18.22 21.85,3.55 21.68,3.38 20.91,3.38 20.25,2.72 v1(20.25,2.27)
IRCUTP: length 27
  TOP w0.102: v1(20.7,1.87) 19.88,1.05 15.5,1.05 13.83,2.73 13.83,9.24 17.17,12.57 19.58,12.57 20.67,11.48 20.82,11.48 U12.1
  BOTTOM w0.102: v1(20.7,1.87) 20.7,2.59 21.17,3.06 22.13,3.06 22.35,2.84 J18.21
LED: length 2.2
  TOP w0.102: v1(19.17,22.43) 18.99,22.26 U8.20
  BOTTOM w0.102: v1(19.17,22.43) 19.76,22.43 R46.1 R45.1
LINK/ACT: length 3
  TOP w0.102: v1(15.8,19.81) 16.01,20.02 U8.11
  BOTTOM w0.102: v1(15.8,19.81) 15.32,19.33 R48.1 R57.2
MCLK: length 2.1
  TOP w0.102: U12.16 24.13,7.36 R27.2
MICP: length 1.6
  TOP w0.178: U12.41 32.45,10.28 32.45,10.01 C97.1
MII: length 2.8
  TOP w0.102: U8.4 v1(13.2,22.66)
  BOTTOM w0.102: R44.1 13.48,21.77 13.2,22.05 v1(13.2,22.66)
MIPI_3V3: length 2.9
  TOP w0.406: R88.2 22.39,2.53 C74.2 22.98,2.36 v1(23.35,2.73)
  BOTTOM w0.406: J18.19 v1(23.35,2.73)
MIPI_AVD08: length 3.5
  TOP w0.178: U12.30 v1(28.59,8.69)
  BOTTOM w0.305: v1(28.59,8.69) 28.25,8.35 C50.1 27.56,7.45 C49.1 26.98,6.88 FB14.1
MIPI_AVD18: length 4
  TOP w0.178: U12.31 v1(29.93,7.85)
  BOTTOM w0.305: FB15.1 C51.1 C52.1 30.78,7.57 30.5,7.85 v1(29.93,7.85)
MIPI_CLKN: length 12
  TOP w0.104: v1(28.53,3) 28.35,3.19 28.02,3.19 27.77,3.44 27.77,4.27 28.59,5.1 31.08,5.1 31.18,5.2 31.18,5.58 31.08,5.68 29.04,5.68 28.78,5.94 28.78,6.58 28.39,6.97 28.33,6.97 U12.26
  BOTTOM w0.104: v1(28.53,3) 28.99,3.45 28.99,4.51 J18.8
MIPI_CLKP: length 12
  TOP w0.104: U12.27 28.57,7.22 28.57,7.16 29.04,6.69 29.04,6.05 29.15,5.94 31.19,5.94 31.44,5.69 31.44,5.09 31.19,4.84 28.7,4.84 28.03,4.17 28.03,3.55 28.13,3.44 28.33,3.44 v1(28.52,3.63)
  BOTTOM w0.104: v1(28.52,3.63) 28.27,3.63 28.1,3.47 28.1,2.5 28.35,2.25 J18.9
MIPI_DATAN0: length 12
  TOP w0.104: U12.24 27.83,6.48 27.9,6.48 28.07,6.3 28.07,6.08 26.94,4.95 26.94,3.02 27.99,1.96 30.98,1.96 31.72,2.71 31.72,3.11 v1(31.91,3.3)
  BOTTOM w0.104: v1(31.91,3.3) 31.91,4.59 J18.2
MIPI_DATAN1: length 12
  TOP w0.104: U12.28 28.83,7.45 28.9,7.45 29.77,6.59 32.06,6.59 32.39,6.26 32.39,4.46 32.18,4.25 29.73,4.25 29.37,3.9 29.37,3.3 29.63,3.05 29.95,3.05 v1(30.1,2.9)
  BOTTOM w0.104: v1(30.1,2.9) 30.1,2.2 J18.5
MIPI_DATAP0: length 11.9
  TOP w0.104: v1(31.27,3.29) 31.46,3.1 31.46,2.82 30.87,2.22 28.1,2.22 27.2,3.12 27.2,4.84 28.33,5.97 28.33,6.41 28.08,6.66 28.08,6.73 U12.25
  BOTTOM w0.104: J18.3 31.35,2.29 30.76,2.88 30.76,3.16 30.89,3.29 v1(31.27,3.29)
